# EAGLE board SparkFun_Buck_Regulator_AP63357DV-7_Buck5V-Panel (EAGLE 9.6.2), part 1 of 4
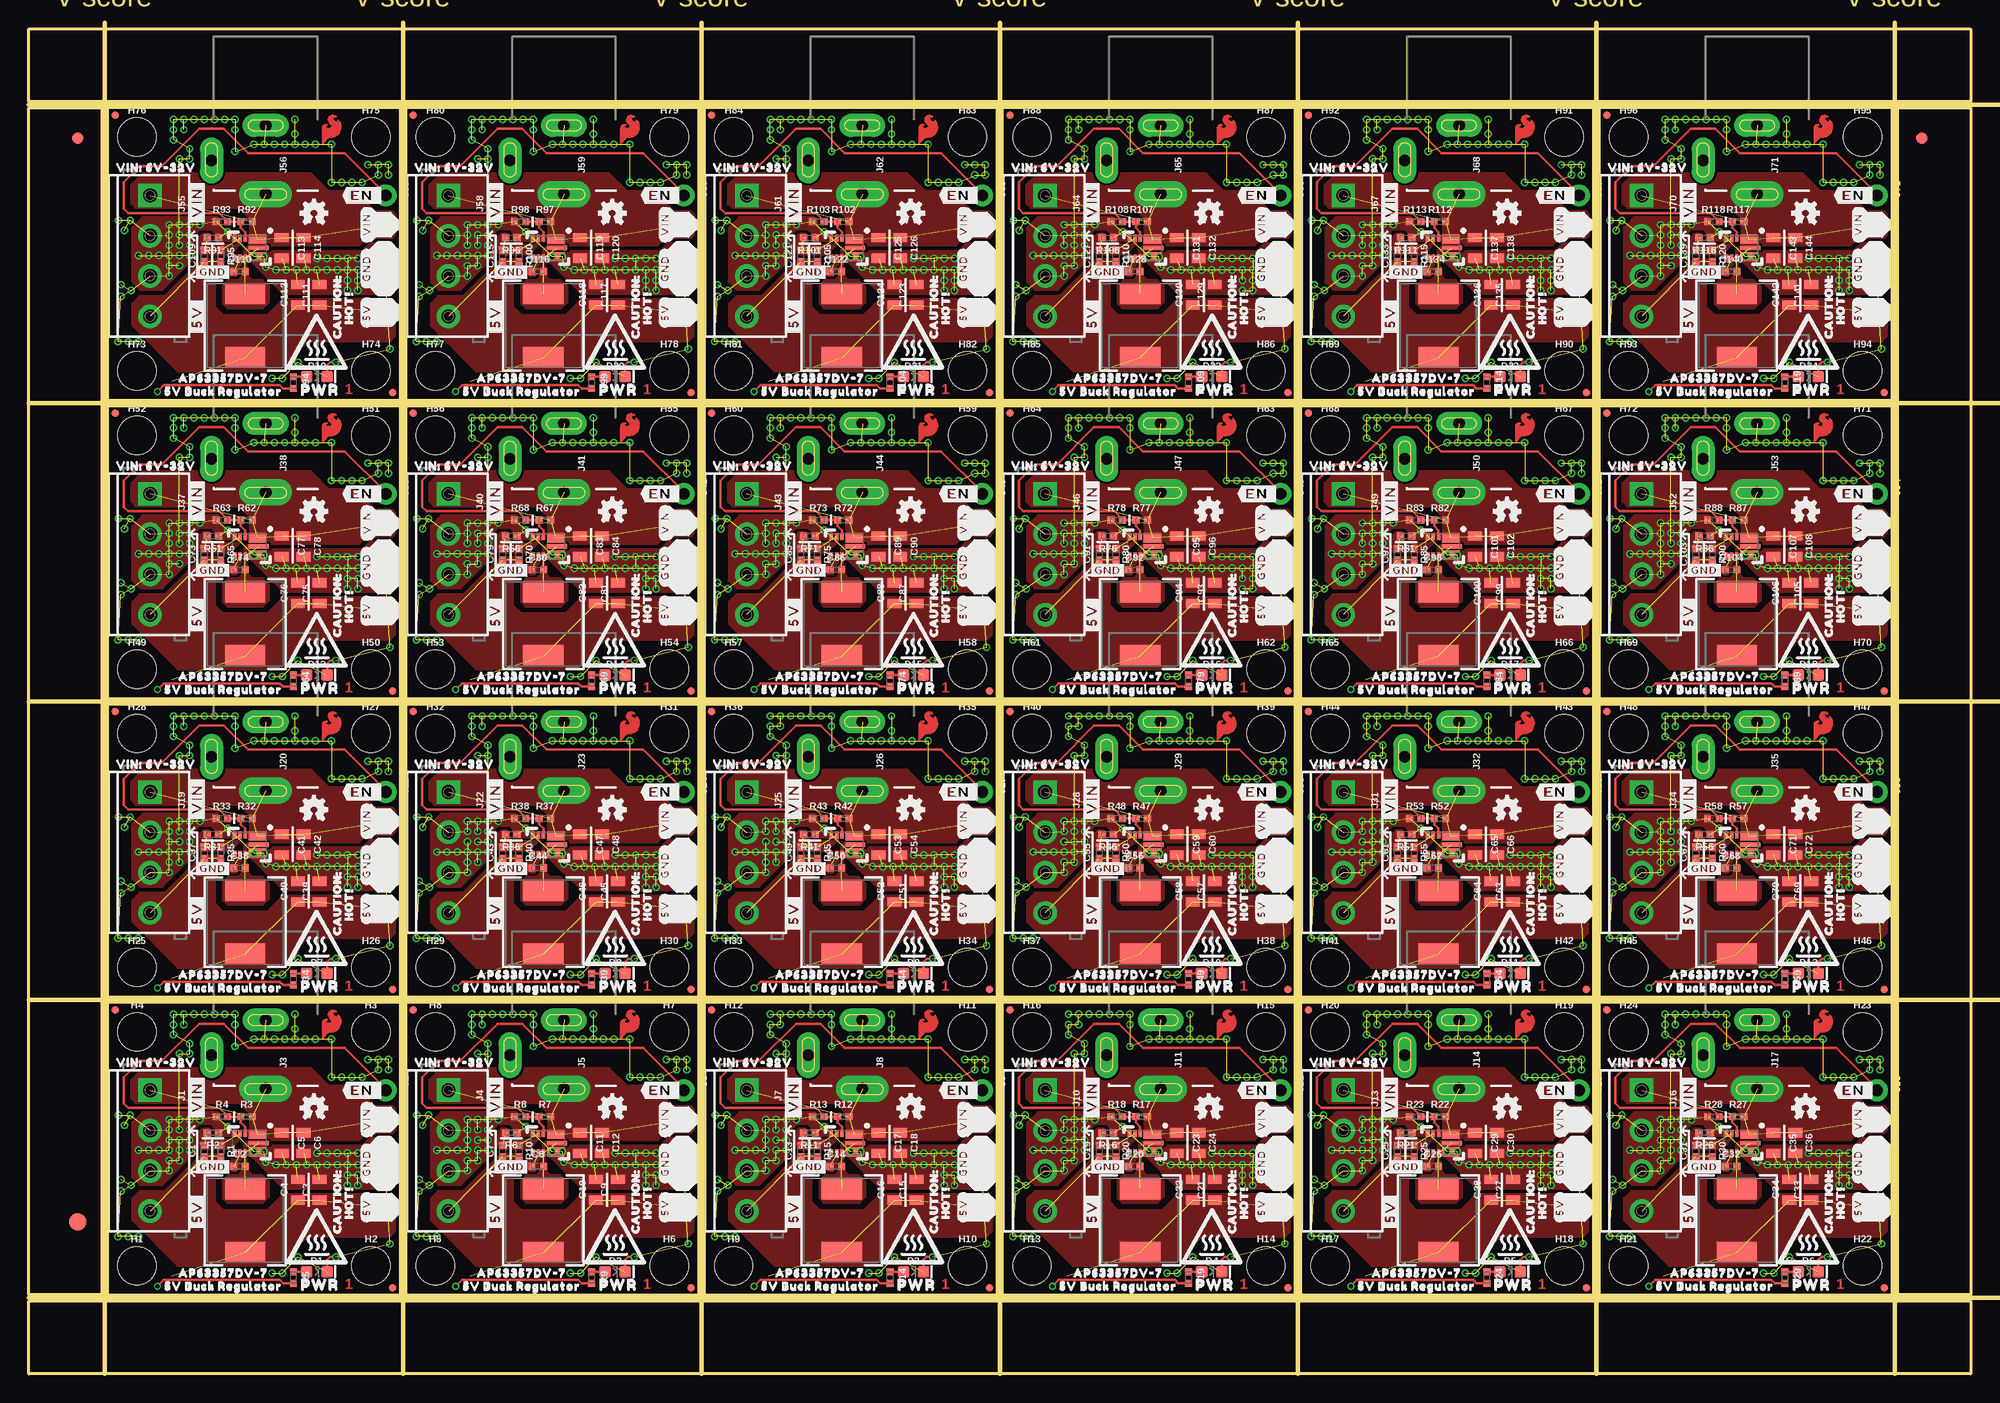
[diagram p0: board, top side]
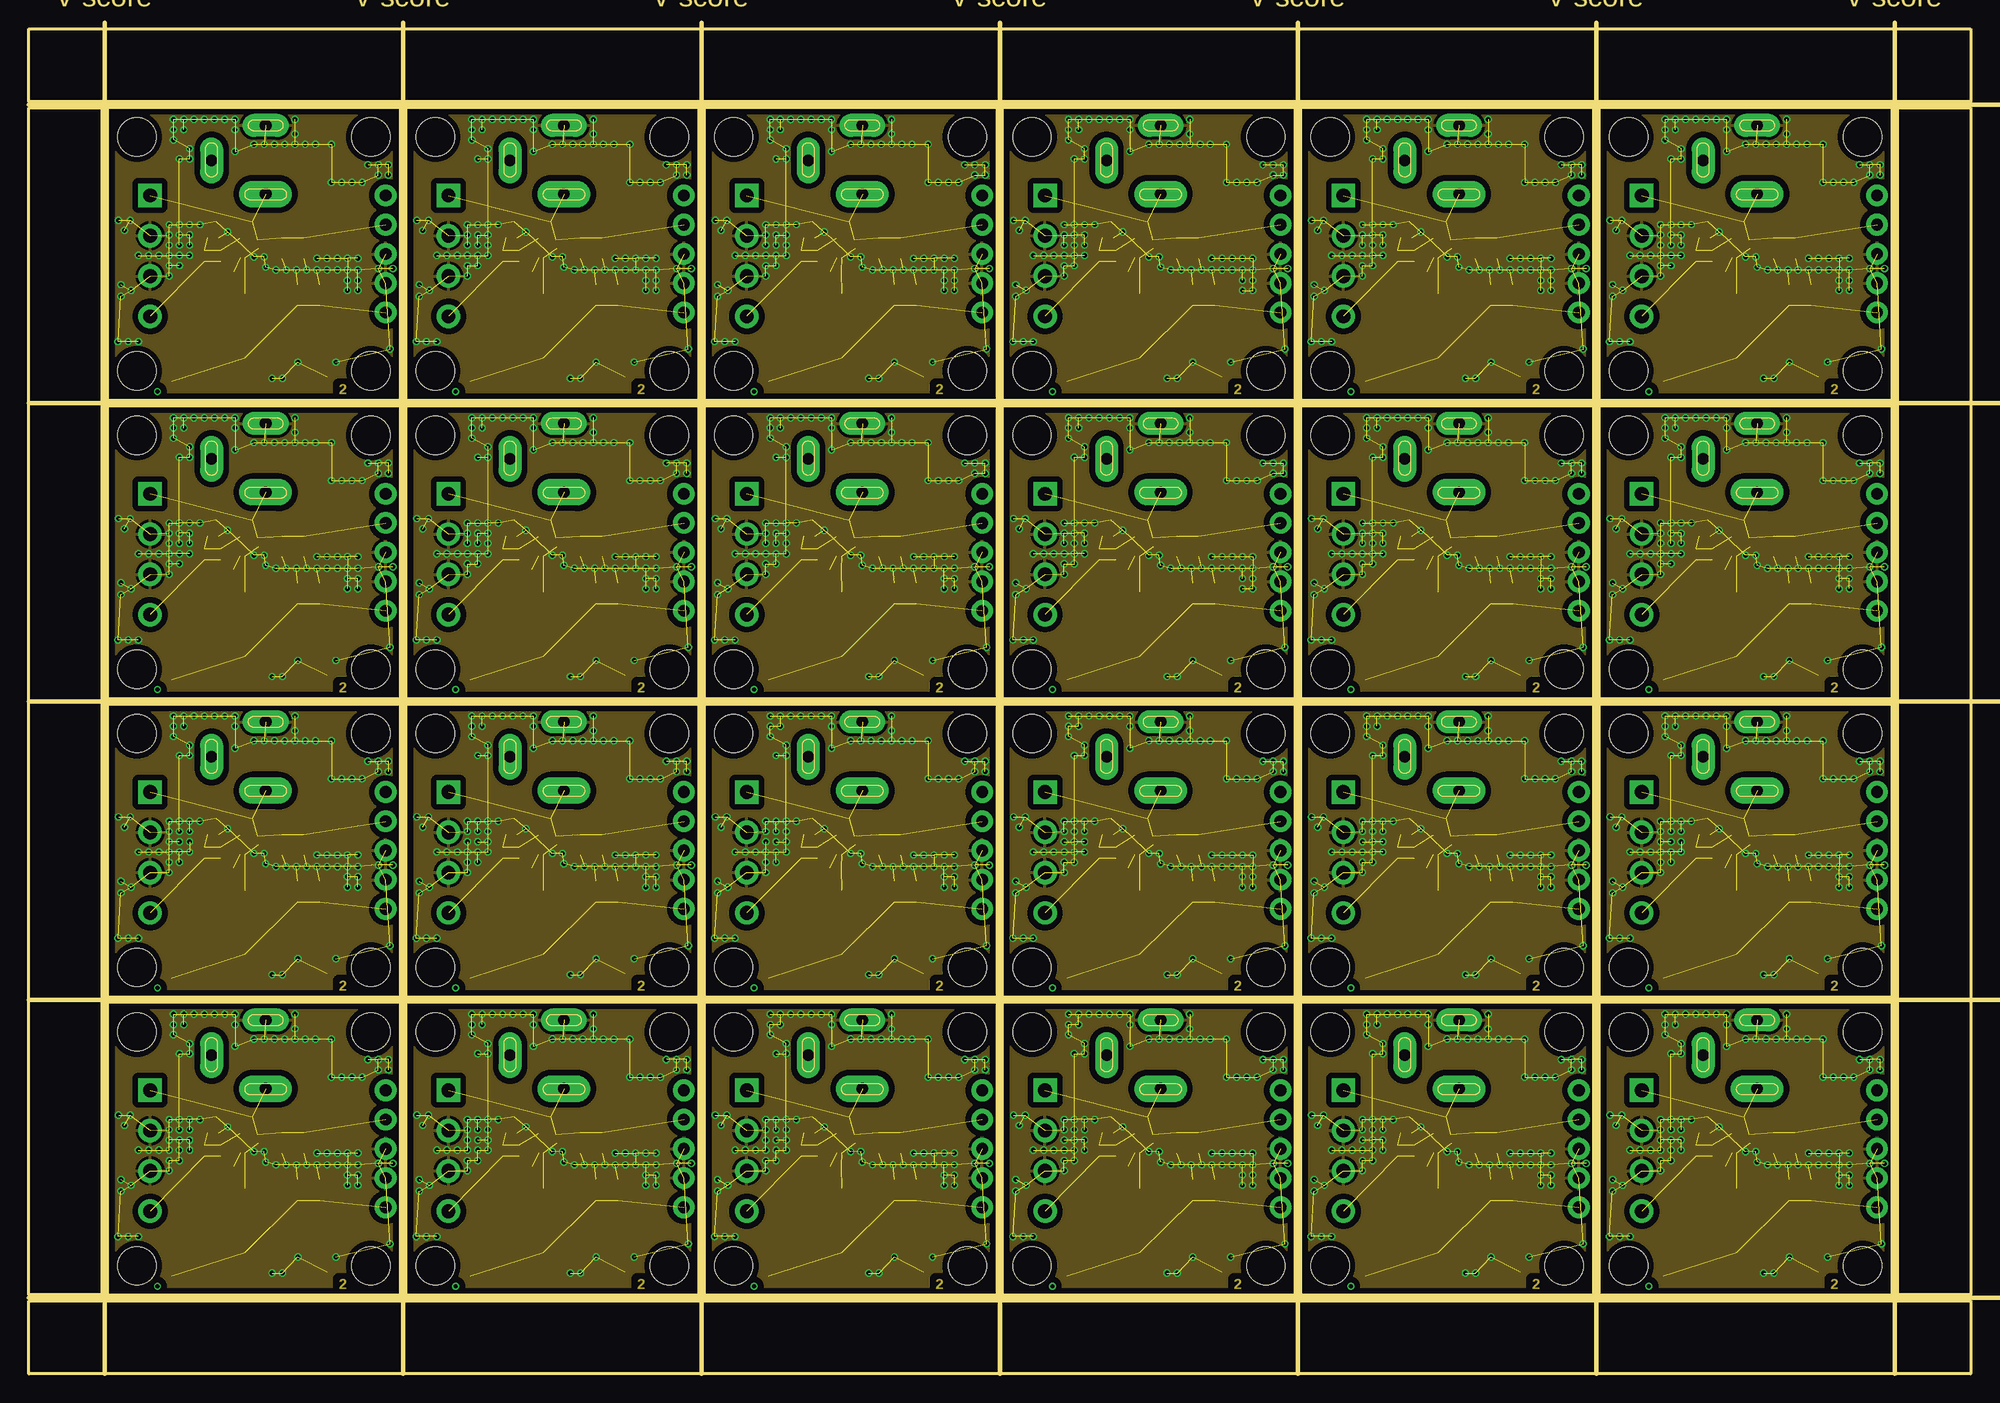
[diagram p1: board, inner layer Route2]
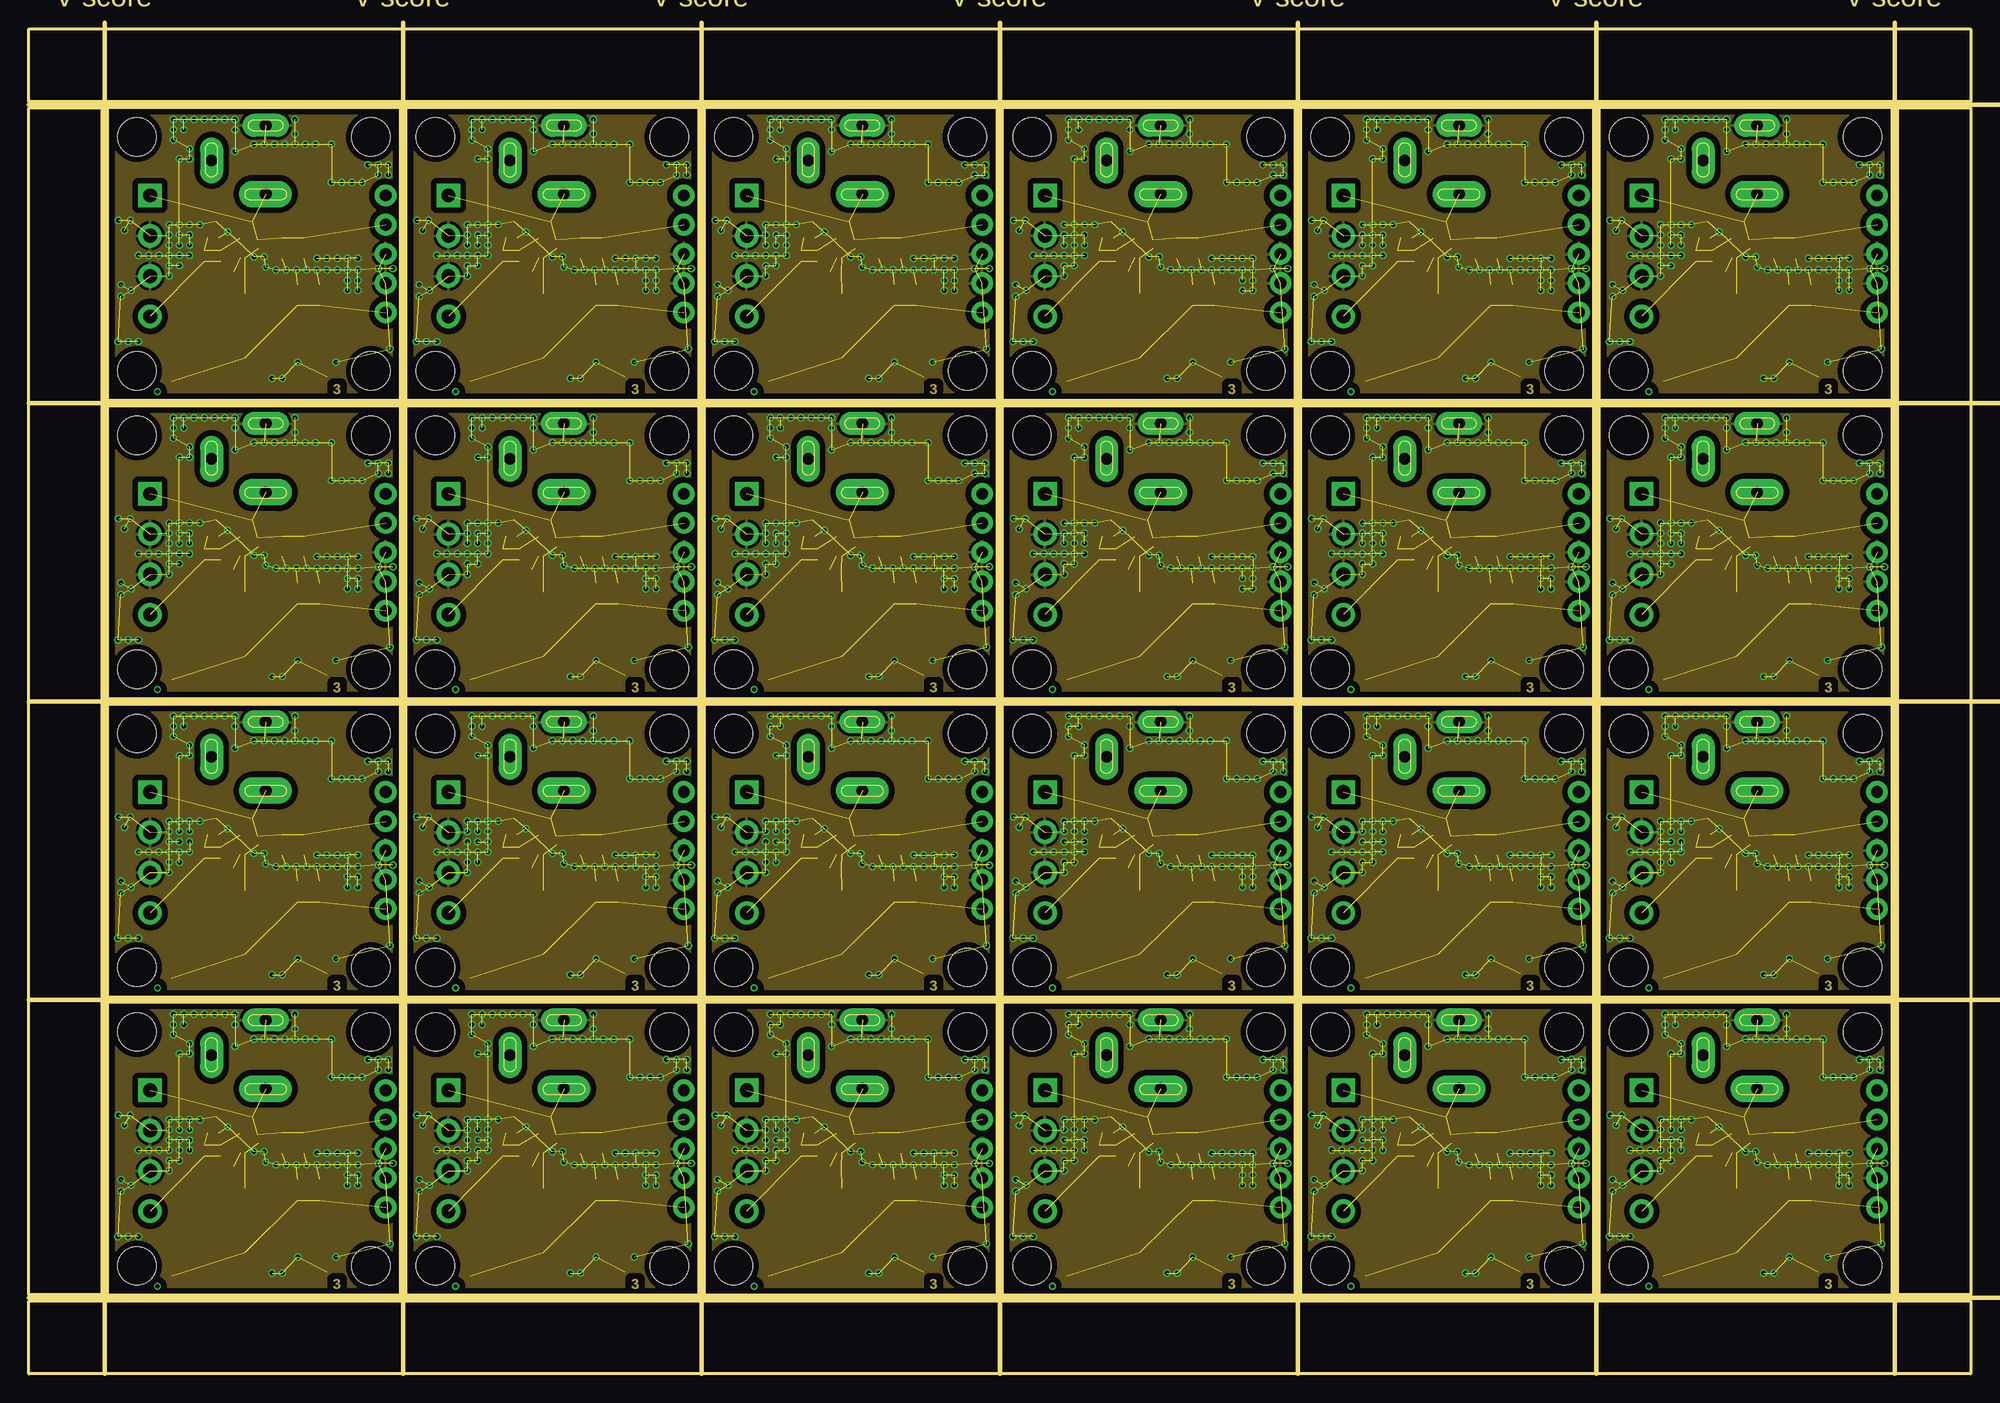
[diagram p2: board, inner layer Route15]
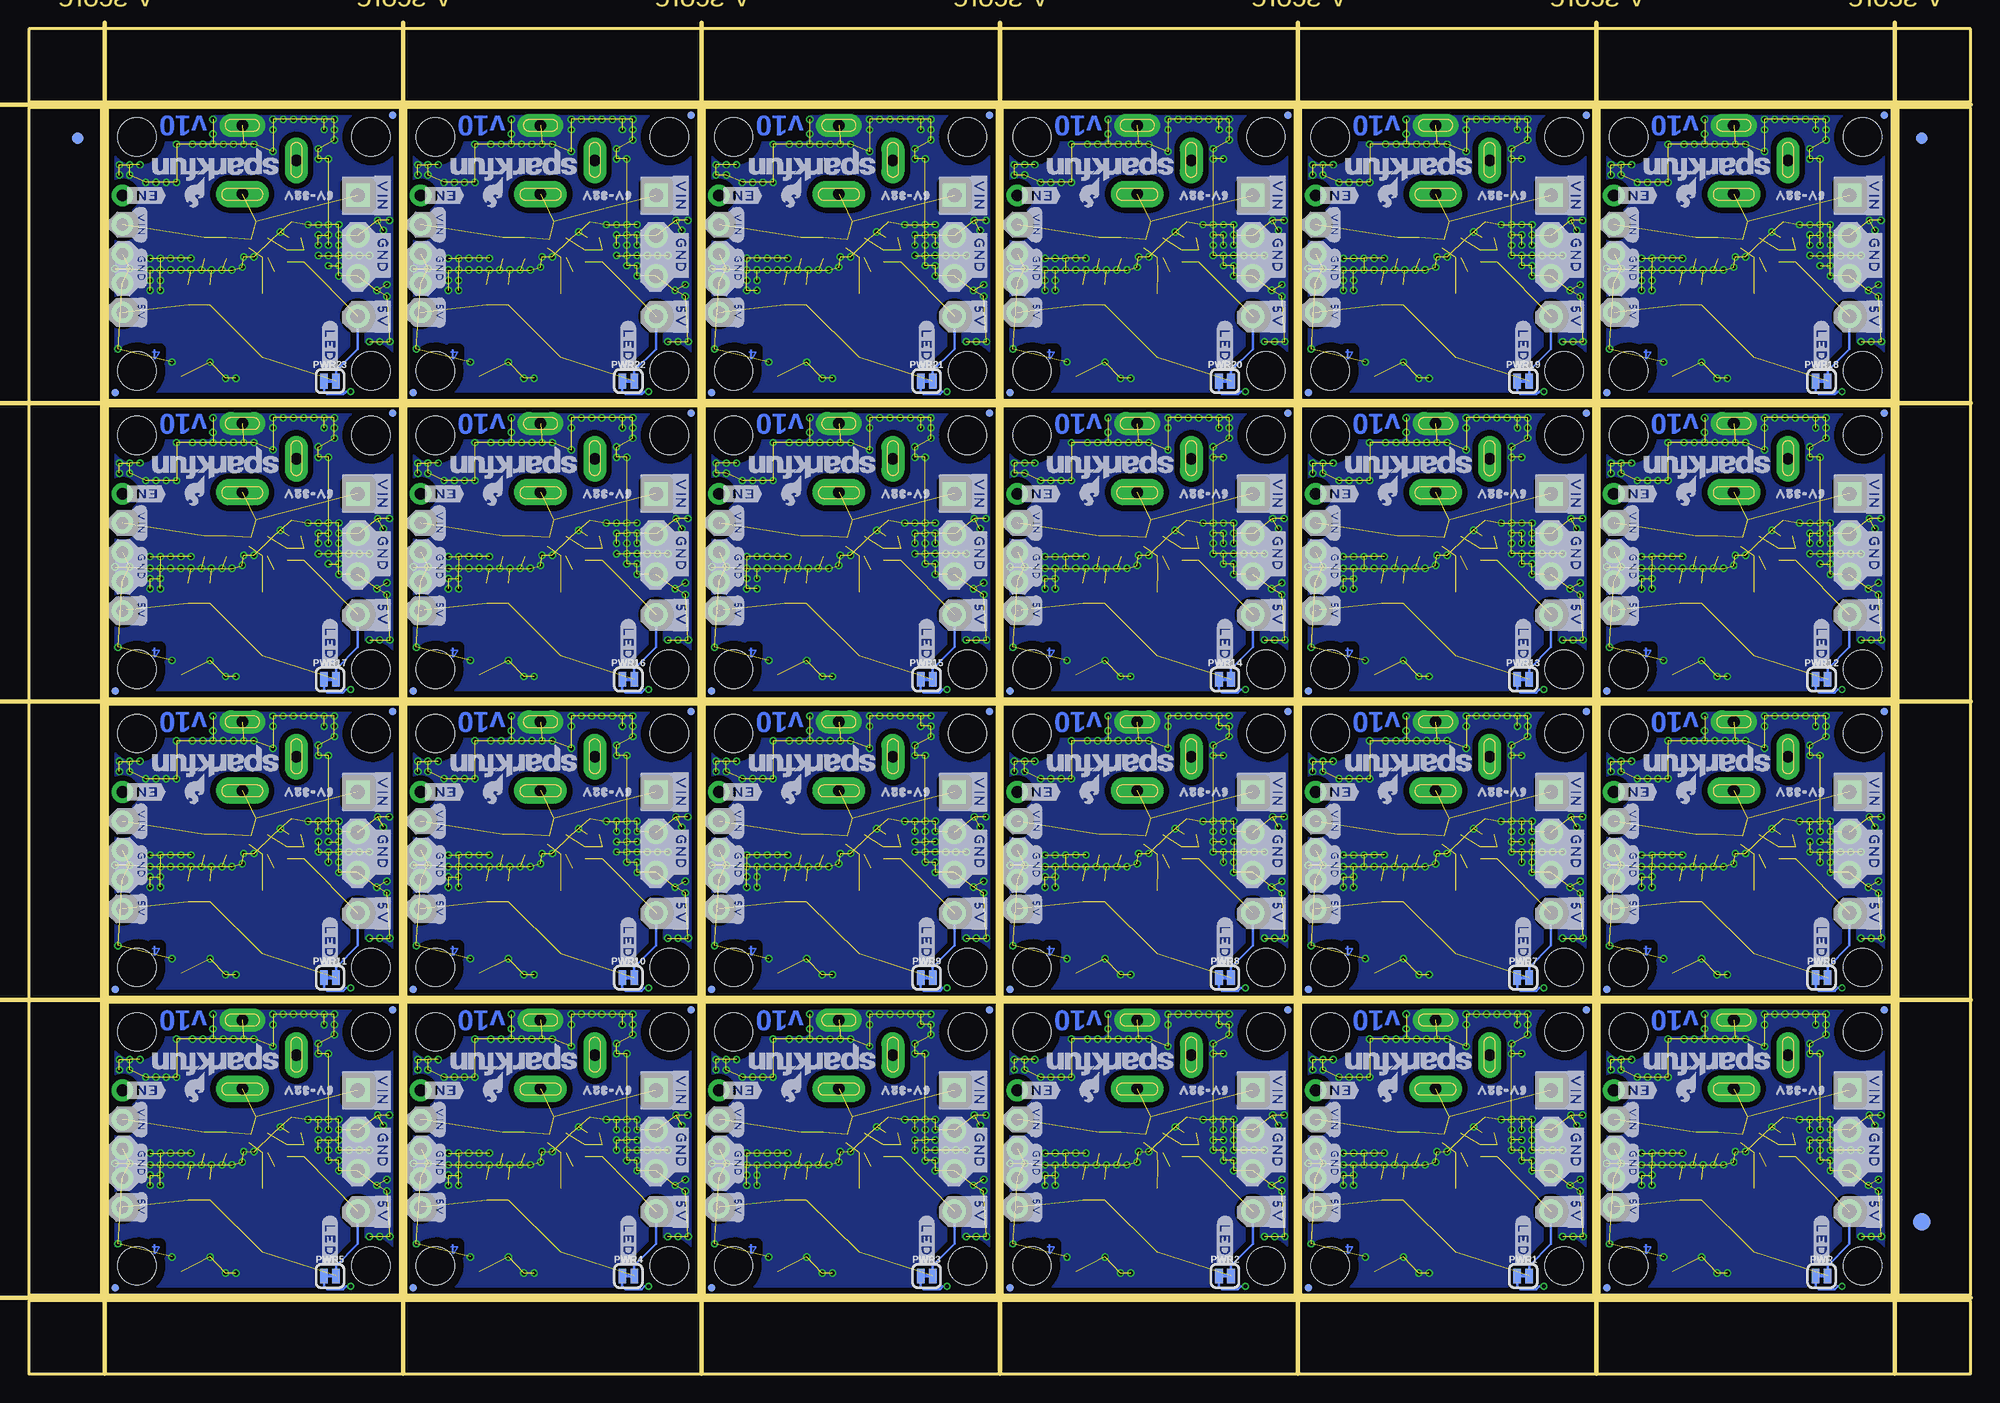
[diagram p3: board, bottom side, seen from below]

Size 168.66 x 116.84 mm. Coordinates in mm from the lower left corner, seen from the top.
Outline: 6.86,6.86 32.26,6.86 32.26,32.26 6.86,32.26 6.86,6.86
Outline: 32.77,6.86 58.17,6.86 58.17,32.26 32.77,32.26 32.77,6.86
Outline: 58.67,6.86 84.07,6.86 84.07,32.26 58.67,32.26 58.67,6.86
Outline: 84.58,6.86 109.98,6.86 109.98,32.26 84.58,32.26 84.58,6.86
Outline: 110.49,6.86 135.89,6.86 135.89,32.26 110.49,32.26 110.49,6.86
Outline: 136.4,6.86 161.8,6.86 161.8,32.26 136.4,32.26 136.4,6.86
Outline: 6.86,32.77 32.26,32.77 32.26,58.17 6.86,58.17 6.86,32.77
Outline: 32.77,32.77 58.17,32.77 58.17,58.17 32.77,58.17 32.77,32.77
Outline: 58.67,32.77 84.07,32.77 84.07,58.17 58.67,58.17 58.67,32.77
Outline: 84.58,32.77 109.98,32.77 109.98,58.17 84.58,58.17 84.58,32.77
Outline: 110.49,32.77 135.89,32.77 135.89,58.17 110.49,58.17 110.49,32.77
Outline: 136.4,32.77 161.8,32.77 161.8,58.17 136.4,58.17 136.4,32.77
Outline: 6.86,58.67 32.26,58.67 32.26,84.07 6.86,84.07 6.86,58.67
Outline: 32.77,58.67 58.17,58.67 58.17,84.07 32.77,84.07 32.77,58.67
Outline: 58.67,58.67 84.07,58.67 84.07,84.07 58.67,84.07 58.67,58.67
Outline: 84.58,58.67 109.98,58.67 109.98,84.07 84.58,84.07 84.58,58.67
Outline: 110.49,58.67 135.89,58.67 135.89,84.07 110.49,84.07 110.49,58.67
Outline: 136.4,58.67 161.8,58.67 161.8,84.07 136.4,84.07 136.4,58.67
Outline: 6.86,84.58 32.26,84.58 32.26,109.98 6.86,109.98 6.86,84.58
Outline: 32.77,84.58 58.17,84.58 58.17,109.98 32.77,109.98 32.77,84.58
Outline: 58.67,84.58 84.07,84.58 84.07,109.98 58.67,109.98 58.67,84.58
Outline: 84.58,84.58 109.98,84.58 109.98,109.98 84.58,109.98 84.58,84.58
Outline: 110.49,84.58 135.89,84.58 135.89,109.98 110.49,109.98 110.49,84.58
Outline: 136.4,84.58 161.8,84.58 161.8,109.98 136.4,109.98 136.4,84.58
Outline: 0,6.35 168.66,6.35 168.66,0 0,0 0,6.35
Outline: 162.31,109.98 168.66,109.98 168.66,6.86 162.31,6.86 162.31,109.98
Outline: 0,116.84 168.66,116.84 168.66,110.49 0,110.49 0,116.84
Outline: 0,109.98 6.35,109.98 6.35,6.86 0,6.86 0,109.98
Copper layers (1*2*15*16): Top 0.035559375mm / dielectric 0.47751875mm / Route2 0.035559375mm / dielectric 0.47751875mm / Route15 0.035559375mm / dielectric 0.47751875mm / Bottom 0.035559375mm
Design rules "SparkFun_Buck_Regulator_AP63357DV-7_Buck5V": minimum track width 5mil, minimum drill 0.2mm, track to track 5mil, track to pad 5mil, pad to pad 5mil, via to via 5mil, smd to smd 5mil, copper to edge 7mil, drill to drill 7mil, minimum pad ring 5mil, minimum via ring 5mil, stop-mask expansion 2.5mil, vias tented up to drill 25mil, thermal gap 10mil
Milling: 12 lines

## Footprints (pad centres in the part's own frame; a part is rotated, then mirrored left to right if it is on the bottom)
0402-TIGHT = smd 0.6 x 0.6: 1 -0.5,0; 2 0.5,0
0805 = smd 0.8 x 1.2: 1 -0.9,0; 2 0.9,0
LED-0603 = smd 1 x 1: A -0.877,0; C 0.877,0
FIDUCIAL-1X2 = smd 1 x 1: 1 0,0
FIDUCIAL-1.5X3 = smd 1.5 x 1.5: 1 0,0
FIDUCIAL-MICRO = smd 0.635 x 0.635: 1 0,0
STAND-OFF = hole 3.302: 0,0
SCREWTERMINAL-3.5MM-4 = drill 1.2 pad 2.032 square: 1 0,0 | drill 1.2 pad 2.032: 2 3.5,0; 3 7,0; 4 10.5,0
1X05_NO_SILK = drill 1.016 pad 1.88: 1 0,0; 2 2.54,0; 3 5.08,0; 4 7.62,0; 5 10.16,0
POWER_JACK_PTH_SLOT_NO_OVRHNG_SILK = drill 1 pad 2 long: GND 0,0; GNDBREAK -3.048,4.699 | drill 1 pad 2.3 long: PWR -5.969,0
07A7_6U8H = smd 1.85 x 3.5: P$1 -2.775,0; P$2 2.775,0
SMT-JUMPER_2_NC_TRACE_SILK = smd 0.66 x 1.27: 1 -0.521,0; 2 0.521,0
V-DFN3020-13 = smd 1.5 x 0.8: P$1 -0.675,-0.75; P$8 -0.675,0.75 | smd 0.3 x 0.6: P$2 0.375,-0.85; P$3 0.825,-0.85; P$4 1.275,-0.85; P$5 1.275,0.85; P$6 0.825,0.85; P$7 0.375,0.85 | smd 1.73 x 0.4: P$9 -0.79,0

## Placement (x,y rotation side)
C1  47pF  [0402-TIGHT]  15.24,19.38 90 top
C2  0.1uF  [0402-TIGHT]  18.29,18.03 0 top
C3  22uF  [0805]  25.27,16 90 top
C4  22uF  [0805]  23.37,16 90 top
C5  4.7uF  [0805]  21.97,20.07 270 top
C6  4.7uF  [0805]  23.88,20.07 270 top
C7  47pF  [0402-TIGHT]  41.15,19.38 90 top
C8  0.1uF  [0402-TIGHT]  44.2,18.03 0 top
C9  22uF  [0805]  51.18,16 90 top
C10  22uF  [0805]  49.28,16 90 top
C11  4.7uF  [0805]  47.88,20.07 270 top
C12  4.7uF  [0805]  49.78,20.07 270 top
C13  47pF  [0402-TIGHT]  67.06,19.38 90 top
C14  0.1uF  [0402-TIGHT]  70.1,18.03 0 top
C15  22uF  [0805]  77.09,16 90 top
C16  22uF  [0805]  75.18,16 90 top
C17  4.7uF  [0805]  73.79,20.07 270 top
C18  4.7uF  [0805]  75.69,20.07 270 top
C19  47pF  [0402-TIGHT]  92.96,19.38 90 top
C20  0.1uF  [0402-TIGHT]  96.01,18.03 0 top
C21  22uF  [0805]  103,16 90 top
C22  22uF  [0805]  101.09,16 90 top
C23  4.7uF  [0805]  99.7,20.07 270 top
C24  4.7uF  [0805]  101.6,20.07 270 top
C25  47pF  [0402-TIGHT]  118.87,19.38 90 top
C26  0.1uF  [0402-TIGHT]  121.92,18.03 0 top
C27  22uF  [0805]  128.91,16 90 top
C28  22uF  [0805]  127,16 90 top
C29  4.7uF  [0805]  125.6,20.07 270 top
C30  4.7uF  [0805]  127.51,20.07 270 top
C31  47pF  [0402-TIGHT]  144.78,19.38 90 top
C32  0.1uF  [0402-TIGHT]  147.83,18.03 0 top
C33  22uF  [0805]  154.81,16 90 top
C34  22uF  [0805]  152.91,16 90 top
C35  4.7uF  [0805]  151.51,20.07 270 top
C36  4.7uF  [0805]  153.42,20.07 270 top
C37  47pF  [0402-TIGHT]  15.24,45.29 90 top
C38  0.1uF  [0402-TIGHT]  18.29,43.94 0 top
C39  22uF  [0805]  25.27,41.91 90 top
C40  22uF  [0805]  23.37,41.91 90 top
C41  4.7uF  [0805]  21.97,45.97 270 top
C42  4.7uF  [0805]  23.88,45.97 270 top
C43  47pF  [0402-TIGHT]  41.15,45.29 90 top
C44  0.1uF  [0402-TIGHT]  44.2,43.94 0 top
C45  22uF  [0805]  51.18,41.91 90 top
C46  22uF  [0805]  49.28,41.91 90 top
C47  4.7uF  [0805]  47.88,45.97 270 top
C48  4.7uF  [0805]  49.78,45.97 270 top
C49  47pF  [0402-TIGHT]  67.06,45.29 90 top
C50  0.1uF  [0402-TIGHT]  70.1,43.94 0 top
C51  22uF  [0805]  77.09,41.91 90 top
C52  22uF  [0805]  75.18,41.91 90 top
C53  4.7uF  [0805]  73.79,45.97 270 top
C54  4.7uF  [0805]  75.69,45.97 270 top
C55  47pF  [0402-TIGHT]  92.96,45.29 90 top
C56  0.1uF  [0402-TIGHT]  96.01,43.94 0 top
C57  22uF  [0805]  103,41.91 90 top
C58  22uF  [0805]  101.09,41.91 90 top
C59  4.7uF  [0805]  99.7,45.97 270 top
C60  4.7uF  [0805]  101.6,45.97 270 top
C61  47pF  [0402-TIGHT]  118.87,45.29 90 top
C62  0.1uF  [0402-TIGHT]  121.92,43.94 0 top
C63  22uF  [0805]  128.91,41.91 90 top
C64  22uF  [0805]  127,41.91 90 top
C65  4.7uF  [0805]  125.6,45.97 270 top
C66  4.7uF  [0805]  127.51,45.97 270 top
C67  47pF  [0402-TIGHT]  144.78,45.29 90 top
C68  0.1uF  [0402-TIGHT]  147.83,43.94 0 top
C69  22uF  [0805]  154.81,41.91 90 top
C70  22uF  [0805]  152.91,41.91 90 top
C71  4.7uF  [0805]  151.51,45.97 270 top
C72  4.7uF  [0805]  153.42,45.97 270 top
C73  47pF  [0402-TIGHT]  15.24,71.2 90 top
C74  0.1uF  [0402-TIGHT]  18.29,69.85 0 top
C75  22uF  [0805]  25.27,67.82 90 top
C76  22uF  [0805]  23.37,67.82 90 top
C77  4.7uF  [0805]  21.97,71.88 270 top
C78  4.7uF  [0805]  23.88,71.88 270 top
C79  47pF  [0402-TIGHT]  41.15,71.2 90 top
C80  0.1uF  [0402-TIGHT]  44.2,69.85 0 top
C81  22uF  [0805]  51.18,67.82 90 top
C82  22uF  [0805]  49.28,67.82 90 top
C83  4.7uF  [0805]  47.88,71.88 270 top
C84  4.7uF  [0805]  49.78,71.88 270 top
C85  47pF  [0402-TIGHT]  67.06,71.2 90 top
C86  0.1uF  [0402-TIGHT]  70.1,69.85 0 top
C87  22uF  [0805]  77.09,67.82 90 top
C88  22uF  [0805]  75.18,67.82 90 top
C89  4.7uF  [0805]  73.79,71.88 270 top
C90  4.7uF  [0805]  75.69,71.88 270 top
C91  47pF  [0402-TIGHT]  92.96,71.2 90 top
C92  0.1uF  [0402-TIGHT]  96.01,69.85 0 top
C93  22uF  [0805]  103,67.82 90 top
C94  22uF  [0805]  101.09,67.82 90 top
C95  4.7uF  [0805]  99.7,71.88 270 top
C96  4.7uF  [0805]  101.6,71.88 270 top
C97  47pF  [0402-TIGHT]  118.87,71.2 90 top
C98  0.1uF  [0402-TIGHT]  121.92,69.85 0 top
C99  22uF  [0805]  128.91,67.82 90 top
C100  22uF  [0805]  127,67.82 90 top
C101  4.7uF  [0805]  125.6,71.88 270 top
C102  4.7uF  [0805]  127.51,71.88 270 top
C103  47pF  [0402-TIGHT]  144.78,71.2 90 top
C104  0.1uF  [0402-TIGHT]  147.83,69.85 0 top
C105  22uF  [0805]  154.81,67.82 90 top
C106  22uF  [0805]  152.91,67.82 90 top
C107  4.7uF  [0805]  151.51,71.88 270 top
C108  4.7uF  [0805]  153.42,71.88 270 top
C109  47pF  [0402-TIGHT]  15.24,97.1 90 top
C110  0.1uF  [0402-TIGHT]  18.29,95.76 0 top
C111  22uF  [0805]  25.27,93.73 90 top
C112  22uF  [0805]  23.37,93.73 90 top
C113  4.7uF  [0805]  21.97,97.79 270 top
C114  4.7uF  [0805]  23.88,97.79 270 top
C115  47pF  [0402-TIGHT]  41.15,97.1 90 top
C116  0.1uF  [0402-TIGHT]  44.2,95.76 0 top
C117  22uF  [0805]  51.18,93.73 90 top
C118  22uF  [0805]  49.28,93.73 90 top
C119  4.7uF  [0805]  47.88,97.79 270 top
C120  4.7uF  [0805]  49.78,97.79 270 top
C121  47pF  [0402-TIGHT]  67.06,97.1 90 top
C122  0.1uF  [0402-TIGHT]  70.1,95.76 0 top
C123  22uF  [0805]  77.09,93.73 90 top
C124  22uF  [0805]  75.18,93.73 90 top
C125  4.7uF  [0805]  73.79,97.79 270 top
C126  4.7uF  [0805]  75.69,97.79 270 top
C127  47pF  [0402-TIGHT]  92.96,97.1 90 top
C128  0.1uF  [0402-TIGHT]  96.01,95.76 0 top
C129  22uF  [0805]  103,93.73 90 top
C130  22uF  [0805]  101.09,93.73 90 top
C131  4.7uF  [0805]  99.7,97.79 270 top
C132  4.7uF  [0805]  101.6,97.79 270 top
C133  47pF  [0402-TIGHT]  118.87,97.1 90 top
C134  0.1uF  [0402-TIGHT]  121.92,95.76 0 top
C135  22uF  [0805]  128.91,93.73 90 top
C136  22uF  [0805]  127,93.73 90 top
C137  4.7uF  [0805]  125.6,97.79 270 top
C138  4.7uF  [0805]  127.51,97.79 270 top
C139  47pF  [0402-TIGHT]  144.78,97.1 90 top
C140  0.1uF  [0402-TIGHT]  147.83,95.76 0 top
C141  22uF  [0805]  154.81,93.73 90 top
C142  22uF  [0805]  152.91,93.73 90 top
C143  4.7uF  [0805]  151.51,97.79 270 top
C144  4.7uF  [0805]  153.42,97.79 270 top
D1  RED  [LED-0603]  25.02,8.89 0 top
D2  RED  [LED-0603]  50.93,8.89 0 top
D3  RED  [LED-0603]  76.84,8.89 0 top
D4  RED  [LED-0603]  102.74,8.89 0 top
D5  RED  [LED-0603]  128.65,8.89 0 top
D6  RED  [LED-0603]  154.56,8.89 0 top
D7  RED  [LED-0603]  25.02,34.8 0 top
D8  RED  [LED-0603]  50.93,34.8 0 top
D9  RED  [LED-0603]  76.84,34.8 0 top
D10  RED  [LED-0603]  102.74,34.8 0 top
D11  RED  [LED-0603]  128.65,34.8 0 top
D12  RED  [LED-0603]  154.56,34.8 0 top
D13  RED  [LED-0603]  25.02,60.71 0 top
D14  RED  [LED-0603]  50.93,60.71 0 top
D15  RED  [LED-0603]  76.84,60.71 0 top
D16  RED  [LED-0603]  102.74,60.71 0 top
D17  RED  [LED-0603]  128.65,60.71 0 top
D18  RED  [LED-0603]  154.56,60.71 0 top
D19  RED  [LED-0603]  25.02,86.61 0 top
D20  RED  [LED-0603]  50.93,86.61 0 top
D21  RED  [LED-0603]  76.84,86.61 0 top
D22  RED  [LED-0603]  102.74,86.61 0 top
D23  RED  [LED-0603]  128.65,86.61 0 top
D24  RED  [LED-0603]  154.56,86.61 0 top
E$1  [FIDUCIAL-1X2]  4.23,107.31 0 top
E$2  [FIDUCIAL-1X2]  4.23,107.31 0 bottom
E$3  [FIDUCIAL-1X2]  164.42,107.31 0 top
E$4  [FIDUCIAL-1X2]  164.42,107.31 0 bottom
E$5  [FIDUCIAL-1.5X3]  4.23,13.21 0 top
E$6  [FIDUCIAL-1.5X3]  4.23,13.21 0 bottom
FD1  FIDUCIALUFIDUCIAL  [FIDUCIAL-MICRO]  31.62,7.49 0 top
FD2  FIDUCIALUFIDUCIAL  [FIDUCIAL-MICRO]  7.49,31.62 0 top
FD3  FIDUCIALUFIDUCIAL  [FIDUCIAL-MICRO]  31.62,7.49 0 bottom
FD4  FIDUCIALUFIDUCIAL  [FIDUCIAL-MICRO]  7.49,31.62 0 bottom
FD5  FIDUCIALUFIDUCIAL  [FIDUCIAL-MICRO]  57.53,7.49 0 top
FD6  FIDUCIALUFIDUCIAL  [FIDUCIAL-MICRO]  33.4,31.62 0 top
FD7  FIDUCIALUFIDUCIAL  [FIDUCIAL-MICRO]  57.53,7.49 0 bottom
FD8  FIDUCIALUFIDUCIAL  [FIDUCIAL-MICRO]  33.4,31.62 0 bottom
FD9  FIDUCIALUFIDUCIAL  [FIDUCIAL-MICRO]  83.44,7.49 0 top
FD10  FIDUCIALUFIDUCIAL  [FIDUCIAL-MICRO]  59.31,31.62 0 top
FD11  FIDUCIALUFIDUCIAL  [FIDUCIAL-MICRO]  83.44,7.49 0 bottom
FD12  FIDUCIALUFIDUCIAL  [FIDUCIAL-MICRO]  59.31,31.62 0 bottom
FD13  FIDUCIALUFIDUCIAL  [FIDUCIAL-MICRO]  109.35,7.49 0 top
FD14  FIDUCIALUFIDUCIAL  [FIDUCIAL-MICRO]  85.22,31.62 0 top
FD15  FIDUCIALUFIDUCIAL  [FIDUCIAL-MICRO]  109.35,7.49 0 bottom
FD16  FIDUCIALUFIDUCIAL  [FIDUCIAL-MICRO]  85.22,31.62 0 bottom
FD17  FIDUCIALUFIDUCIAL  [FIDUCIAL-MICRO]  135.25,7.49 0 top
FD18  FIDUCIALUFIDUCIAL  [FIDUCIAL-MICRO]  111.12,31.62 0 top
FD19  FIDUCIALUFIDUCIAL  [FIDUCIAL-MICRO]  135.25,7.49 0 bottom
FD20  FIDUCIALUFIDUCIAL  [FIDUCIAL-MICRO]  111.12,31.62 0 bottom
FD21  FIDUCIALUFIDUCIAL  [FIDUCIAL-MICRO]  161.16,7.49 0 top
FD22  FIDUCIALUFIDUCIAL  [FIDUCIAL-MICRO]  137.03,31.62 0 top
FD23  FIDUCIALUFIDUCIAL  [FIDUCIAL-MICRO]  161.16,7.49 0 bottom
FD24  FIDUCIALUFIDUCIAL  [FIDUCIAL-MICRO]  137.03,31.62 0 bottom
FD25  FIDUCIALUFIDUCIAL  [FIDUCIAL-MICRO]  31.62,33.4 0 top
FD26  FIDUCIALUFIDUCIAL  [FIDUCIAL-MICRO]  7.49,57.53 0 top
FD27  FIDUCIALUFIDUCIAL  [FIDUCIAL-MICRO]  31.62,33.4 0 bottom
FD28  FIDUCIALUFIDUCIAL  [FIDUCIAL-MICRO]  7.49,57.53 0 bottom
FD29  FIDUCIALUFIDUCIAL  [FIDUCIAL-MICRO]  57.53,33.4 0 top
FD30  FIDUCIALUFIDUCIAL  [FIDUCIAL-MICRO]  33.4,57.53 0 top
FD31  FIDUCIALUFIDUCIAL  [FIDUCIAL-MICRO]  57.53,33.4 0 bottom
FD32  FIDUCIALUFIDUCIAL  [FIDUCIAL-MICRO]  33.4,57.53 0 bottom
FD33  FIDUCIALUFIDUCIAL  [FIDUCIAL-MICRO]  83.44,33.4 0 top
FD34  FIDUCIALUFIDUCIAL  [FIDUCIAL-MICRO]  59.31,57.53 0 top
FD35  FIDUCIALUFIDUCIAL  [FIDUCIAL-MICRO]  83.44,33.4 0 bottom
FD36  FIDUCIALUFIDUCIAL  [FIDUCIAL-MICRO]  59.31,57.53 0 bottom
FD37  FIDUCIALUFIDUCIAL  [FIDUCIAL-MICRO]  109.35,33.4 0 top
FD38  FIDUCIALUFIDUCIAL  [FIDUCIAL-MICRO]  85.22,57.53 0 top
FD39  FIDUCIALUFIDUCIAL  [FIDUCIAL-MICRO]  109.35,33.4 0 bottom
FD40  FIDUCIALUFIDUCIAL  [FIDUCIAL-MICRO]  85.22,57.53 0 bottom
FD41  FIDUCIALUFIDUCIAL  [FIDUCIAL-MICRO]  135.25,33.4 0 top
FD42  FIDUCIALUFIDUCIAL  [FIDUCIAL-MICRO]  111.12,57.53 0 top
FD43  FIDUCIALUFIDUCIAL  [FIDUCIAL-MICRO]  135.25,33.4 0 bottom
FD44  FIDUCIALUFIDUCIAL  [FIDUCIAL-MICRO]  111.12,57.53 0 bottom
FD45  FIDUCIALUFIDUCIAL  [FIDUCIAL-MICRO]  161.16,33.4 0 top
FD46  FIDUCIALUFIDUCIAL  [FIDUCIAL-MICRO]  137.03,57.53 0 top
FD47  FIDUCIALUFIDUCIAL  [FIDUCIAL-MICRO]  161.16,33.4 0 bottom
FD48  FIDUCIALUFIDUCIAL  [FIDUCIAL-MICRO]  137.03,57.53 0 bottom
FD49  FIDUCIALUFIDUCIAL  [FIDUCIAL-MICRO]  31.62,59.31 0 top
FD50  FIDUCIALUFIDUCIAL  [FIDUCIAL-MICRO]  7.49,83.44 0 top
FD51  FIDUCIALUFIDUCIAL  [FIDUCIAL-MICRO]  31.62,59.31 0 bottom
FD52  FIDUCIALUFIDUCIAL  [FIDUCIAL-MICRO]  7.49,83.44 0 bottom
FD53  FIDUCIALUFIDUCIAL  [FIDUCIAL-MICRO]  57.53,59.31 0 top
FD54  FIDUCIALUFIDUCIAL  [FIDUCIAL-MICRO]  33.4,83.44 0 top
FD55  FIDUCIALUFIDUCIAL  [FIDUCIAL-MICRO]  57.53,59.31 0 bottom
FD56  FIDUCIALUFIDUCIAL  [FIDUCIAL-MICRO]  33.4,83.44 0 bottom
FD57  FIDUCIALUFIDUCIAL  [FIDUCIAL-MICRO]  83.44,59.31 0 top
FD58  FIDUCIALUFIDUCIAL  [FIDUCIAL-MICRO]  59.31,83.44 0 top
FD59  FIDUCIALUFIDUCIAL  [FIDUCIAL-MICRO]  83.44,59.31 0 bottom
FD60  FIDUCIALUFIDUCIAL  [FIDUCIAL-MICRO]  59.31,83.44 0 bottom
FD61  FIDUCIALUFIDUCIAL  [FIDUCIAL-MICRO]  109.35,59.31 0 top
FD62  FIDUCIALUFIDUCIAL  [FIDUCIAL-MICRO]  85.22,83.44 0 top
FD63  FIDUCIALUFIDUCIAL  [FIDUCIAL-MICRO]  109.35,59.31 0 bottom
FD64  FIDUCIALUFIDUCIAL  [FIDUCIAL-MICRO]  85.22,83.44 0 bottom
FD65  FIDUCIALUFIDUCIAL  [FIDUCIAL-MICRO]  135.25,59.31 0 top
FD66  FIDUCIALUFIDUCIAL  [FIDUCIAL-MICRO]  111.12,83.44 0 top
FD67  FIDUCIALUFIDUCIAL  [FIDUCIAL-MICRO]  135.25,59.31 0 bottom
FD68  FIDUCIALUFIDUCIAL  [FIDUCIAL-MICRO]  111.12,83.44 0 bottom
FD69  FIDUCIALUFIDUCIAL  [FIDUCIAL-MICRO]  161.16,59.31 0 top
FD70  FIDUCIALUFIDUCIAL  [FIDUCIAL-MICRO]  137.03,83.44 0 top
FD71  FIDUCIALUFIDUCIAL  [FIDUCIAL-MICRO]  161.16,59.31 0 bottom
FD72  FIDUCIALUFIDUCIAL  [FIDUCIAL-MICRO]  137.03,83.44 0 bottom
FD73  FIDUCIALUFIDUCIAL  [FIDUCIAL-MICRO]  31.62,85.22 0 top
FD74  FIDUCIALUFIDUCIAL  [FIDUCIAL-MICRO]  7.49,109.35 0 top
FD75  FIDUCIALUFIDUCIAL  [FIDUCIAL-MICRO]  31.62,85.22 0 bottom
FD76  FIDUCIALUFIDUCIAL  [FIDUCIAL-MICRO]  7.49,109.35 0 bottom
FD77  FIDUCIALUFIDUCIAL  [FIDUCIAL-MICRO]  57.53,85.22 0 top
FD78  FIDUCIALUFIDUCIAL  [FIDUCIAL-MICRO]  33.4,109.35 0 top
FD79  FIDUCIALUFIDUCIAL  [FIDUCIAL-MICRO]  57.53,85.22 0 bottom
FD80  FIDUCIALUFIDUCIAL  [FIDUCIAL-MICRO]  33.4,109.35 0 bottom
FD81  FIDUCIALUFIDUCIAL  [FIDUCIAL-MICRO]  83.44,85.22 0 top
FD82  FIDUCIALUFIDUCIAL  [FIDUCIAL-MICRO]  59.31,109.35 0 top
FD83  FIDUCIALUFIDUCIAL  [FIDUCIAL-MICRO]  83.44,85.22 0 bottom
FD84  FIDUCIALUFIDUCIAL  [FIDUCIAL-MICRO]  59.31,109.35 0 bottom
FD85  FIDUCIALUFIDUCIAL  [FIDUCIAL-MICRO]  109.35,85.22 0 top
FD86  FIDUCIALUFIDUCIAL  [FIDUCIAL-MICRO]  85.22,109.35 0 top
FD87  FIDUCIALUFIDUCIAL  [FIDUCIAL-MICRO]  109.35,85.22 0 bottom
FD88  FIDUCIALUFIDUCIAL  [FIDUCIAL-MICRO]  85.22,109.35 0 bottom
FD89  FIDUCIALUFIDUCIAL  [FIDUCIAL-MICRO]  135.25,85.22 0 top
FD90  FIDUCIALUFIDUCIAL  [FIDUCIAL-MICRO]  111.12,109.35 0 top
FD91  FIDUCIALUFIDUCIAL  [FIDUCIAL-MICRO]  135.25,85.22 0 bottom
FD92  FIDUCIALUFIDUCIAL  [FIDUCIAL-MICRO]  111.12,109.35 0 bottom
FD93  FIDUCIALUFIDUCIAL  [FIDUCIAL-MICRO]  161.16,85.22 0 top
FD94  FIDUCIALUFIDUCIAL  [FIDUCIAL-MICRO]  137.03,109.35 0 top
FD95  FIDUCIALUFIDUCIAL  [FIDUCIAL-MICRO]  161.16,85.22 0 bottom
FD96  FIDUCIALUFIDUCIAL  [FIDUCIAL-MICRO]  137.03,109.35 0 bottom
H1  STAND-OFF  [STAND-OFF]  9.4,9.4 0 top
H2  STAND-OFF  [STAND-OFF]  29.72,9.4 0 top
H3  STAND-OFF  [STAND-OFF]  29.72,29.72 0 top
H4  STAND-OFF  [STAND-OFF]  9.4,29.72 0 top
H5  STAND-OFF  [STAND-OFF]  35.31,9.4 0 top
H6  STAND-OFF  [STAND-OFF]  55.63,9.4 0 top
H7  STAND-OFF  [STAND-OFF]  55.63,29.72 0 top
H8  STAND-OFF  [STAND-OFF]  35.31,29.72 0 top
H9  STAND-OFF  [STAND-OFF]  61.21,9.4 0 top
H10  STAND-OFF  [STAND-OFF]  81.53,9.4 0 top
H11  STAND-OFF  [STAND-OFF]  81.53,29.72 0 top
H12  STAND-OFF  [STAND-OFF]  61.21,29.72 0 top
H13  STAND-OFF  [STAND-OFF]  87.12,9.4 0 top
H14  STAND-OFF  [STAND-OFF]  107.44,9.4 0 top
H15  STAND-OFF  [STAND-OFF]  107.44,29.72 0 top
H16  STAND-OFF  [STAND-OFF]  87.12,29.72 0 top
H17  STAND-OFF  [STAND-OFF]  113.03,9.4 0 top
H18  STAND-OFF  [STAND-OFF]  133.35,9.4 0 top
H19  STAND-OFF  [STAND-OFF]  133.35,29.72 0 top
H20  STAND-OFF  [STAND-OFF]  113.03,29.72 0 top
H21  STAND-OFF  [STAND-OFF]  138.94,9.4 0 top
H22  STAND-OFF  [STAND-OFF]  159.26,9.4 0 top
H23  STAND-OFF  [STAND-OFF]  159.26,29.72 0 top
H24  STAND-OFF  [STAND-OFF]  138.94,29.72 0 top
H25  STAND-OFF  [STAND-OFF]  9.4,35.31 0 top
H26  STAND-OFF  [STAND-OFF]  29.72,35.31 0 top
H27  STAND-OFF  [STAND-OFF]  29.72,55.63 0 top
H28  STAND-OFF  [STAND-OFF]  9.4,55.63 0 top
H29  STAND-OFF  [STAND-OFF]  35.31,35.31 0 top
H30  STAND-OFF  [STAND-OFF]  55.63,35.31 0 top
H31  STAND-OFF  [STAND-OFF]  55.63,55.63 0 top
H32  STAND-OFF  [STAND-OFF]  35.31,55.63 0 top
H33  STAND-OFF  [STAND-OFF]  61.21,35.31 0 top
H34  STAND-OFF  [STAND-OFF]  81.53,35.31 0 top
H35  STAND-OFF  [STAND-OFF]  81.53,55.63 0 top
H36  STAND-OFF  [STAND-OFF]  61.21,55.63 0 top
H37  STAND-OFF  [STAND-OFF]  87.12,35.31 0 top
H38  STAND-OFF  [STAND-OFF]  107.44,35.31 0 top
H39  STAND-OFF  [STAND-OFF]  107.44,55.63 0 top
H40  STAND-OFF  [STAND-OFF]  87.12,55.63 0 top
H41  STAND-OFF  [STAND-OFF]  113.03,35.31 0 top
H42  STAND-OFF  [STAND-OFF]  133.35,35.31 0 top
H43  STAND-OFF  [STAND-OFF]  133.35,55.63 0 top
H44  STAND-OFF  [STAND-OFF]  113.03,55.63 0 top
H45  STAND-OFF  [STAND-OFF]  138.94,35.31 0 top
H46  STAND-OFF  [STAND-OFF]  159.26,35.31 0 top
H47  STAND-OFF  [STAND-OFF]  159.26,55.63 0 top
H48  STAND-OFF  [STAND-OFF]  138.94,55.63 0 top
H49  STAND-OFF  [STAND-OFF]  9.4,61.21 0 top
H50  STAND-OFF  [STAND-OFF]  29.72,61.21 0 top
H51  STAND-OFF  [STAND-OFF]  29.72,81.53 0 top
H52  STAND-OFF  [STAND-OFF]  9.4,81.53 0 top
H53  STAND-OFF  [STAND-OFF]  35.31,61.21 0 top
H54  STAND-OFF  [STAND-OFF]  55.63,61.21 0 top
H55  STAND-OFF  [STAND-OFF]  55.63,81.53 0 top
H56  STAND-OFF  [STAND-OFF]  35.31,81.53 0 top
H57  STAND-OFF  [STAND-OFF]  61.21,61.21 0 top
H58  STAND-OFF  [STAND-OFF]  81.53,61.21 0 top
H59  STAND-OFF  [STAND-OFF]  81.53,81.53 0 top
H60  STAND-OFF  [STAND-OFF]  61.21,81.53 0 top
H61  STAND-OFF  [STAND-OFF]  87.12,61.21 0 top
H62  STAND-OFF  [STAND-OFF]  107.44,61.21 0 top
H63  STAND-OFF  [STAND-OFF]  107.44,81.53 0 top
H64  STAND-OFF  [STAND-OFF]  87.12,81.53 0 top
H65  STAND-OFF  [STAND-OFF]  113.03,61.21 0 top
H66  STAND-OFF  [STAND-OFF]  133.35,61.21 0 top
H67  STAND-OFF  [STAND-OFF]  133.35,81.53 0 top
H68  STAND-OFF  [STAND-OFF]  113.03,81.53 0 top
H69  STAND-OFF  [STAND-OFF]  138.94,61.21 0 top
H70  STAND-OFF  [STAND-OFF]  159.26,61.21 0 top
H71  STAND-OFF  [STAND-OFF]  159.26,81.53 0 top
H72  STAND-OFF  [STAND-OFF]  138.94,81.53 0 top
H73  STAND-OFF  [STAND-OFF]  9.4,87.12 0 top
H74  STAND-OFF  [STAND-OFF]  29.72,87.12 0 top
H75  STAND-OFF  [STAND-OFF]  29.72,107.44 0 top
H76  STAND-OFF  [STAND-OFF]  9.4,107.44 0 top
H77  STAND-OFF  [STAND-OFF]  35.31,87.12 0 top
H78  STAND-OFF  [STAND-OFF]  55.63,87.12 0 top
H79  STAND-OFF  [STAND-OFF]  55.63,107.44 0 top
H80  STAND-OFF  [STAND-OFF]  35.31,107.44 0 top
H81  STAND-OFF  [STAND-OFF]  61.21,87.12 0 top
H82  STAND-OFF  [STAND-OFF]  81.53,87.12 0 top
H83  STAND-OFF  [STAND-OFF]  81.53,107.44 0 top
H84  STAND-OFF  [STAND-OFF]  61.21,107.44 0 top
H85  STAND-OFF  [STAND-OFF]  87.12,87.12 0 top
H86  STAND-OFF  [STAND-OFF]  107.44,87.12 0 top
H87  STAND-OFF  [STAND-OFF]  107.44,107.44 0 top
H88  STAND-OFF  [STAND-OFF]  87.12,107.44 0 top
H89  STAND-OFF  [STAND-OFF]  113.03,87.12 0 top
H90  STAND-OFF  [STAND-OFF]  133.35,87.12 0 top
H91  STAND-OFF  [STAND-OFF]  133.35,107.44 0 top
H92  STAND-OFF  [STAND-OFF]  113.03,107.44 0 top
H93  STAND-OFF  [STAND-OFF]  138.94,87.12 0 top
H94  STAND-OFF  [STAND-OFF]  159.26,87.12 0 top
H95  STAND-OFF  [STAND-OFF]  159.26,107.44 0 top
H96  STAND-OFF  [STAND-OFF]  138.94,107.44 0 top
J1  [SCREWTERMINAL-3.5MM-4]  10.54,24.64 270 top
J2  [1X05_NO_SILK]  30.99,24.64 270 top
J3  POWER_JACK  [POWER_JACK_PTH_SLOT_NO_OVRHNG_SILK]  20.57,30.73 90 top
J4  [SCREWTERMINAL-3.5MM-4]  36.45,24.64 270 top
J5  POWER_JACK  [POWER_JACK_PTH_SLOT_NO_OVRHNG_SILK]  46.48,30.73 90 top
J6  [1X05_NO_SILK]  56.9,24.64 270 top
J7  [SCREWTERMINAL-3.5MM-4]  62.36,24.64 270 top
J8  POWER_JACK  [POWER_JACK_PTH_SLOT_NO_OVRHNG_SILK]  72.39,30.73 90 top
J9  [1X05_NO_SILK]  82.8,24.64 270 top
J10  [SCREWTERMINAL-3.5MM-4]  88.27,24.64 270 top
J11  POWER_JACK  [POWER_JACK_PTH_SLOT_NO_OVRHNG_SILK]  98.3,30.73 90 top
J12  [1X05_NO_SILK]  108.71,24.64 270 top
J13  [SCREWTERMINAL-3.5MM-4]  114.17,24.64 270 top
J14  POWER_JACK  [POWER_JACK_PTH_SLOT_NO_OVRHNG_SILK]  124.21,30.73 90 top
J15  [1X05_NO_SILK]  134.62,24.64 270 top
J16  [SCREWTERMINAL-3.5MM-4]  140.08,24.64 270 top
J17  POWER_JACK  [POWER_JACK_PTH_SLOT_NO_OVRHNG_SILK]  150.11,30.73 90 top
J18  [1X05_NO_SILK]  160.53,24.64 270 top
J19  [SCREWTERMINAL-3.5MM-4]  10.54,50.55 270 top
J20  POWER_JACK  [POWER_JACK_PTH_SLOT_NO_OVRHNG_SILK]  20.57,56.64 90 top
J21  [1X05_NO_SILK]  30.99,50.55 270 top
J22  [SCREWTERMINAL-3.5MM-4]  36.45,50.55 270 top
J23  POWER_JACK  [POWER_JACK_PTH_SLOT_NO_OVRHNG_SILK]  46.48,56.64 90 top
J24  [1X05_NO_SILK]  56.9,50.55 270 top
J25  [SCREWTERMINAL-3.5MM-4]  62.36,50.55 270 top
J26  POWER_JACK  [POWER_JACK_PTH_SLOT_NO_OVRHNG_SILK]  72.39,56.64 90 top
J27  [1X05_NO_SILK]  82.8,50.55 270 top
J28  [SCREWTERMINAL-3.5MM-4]  88.27,50.55 270 top
J29  POWER_JACK  [POWER_JACK_PTH_SLOT_NO_OVRHNG_SILK]  98.3,56.64 90 top
J30  [1X05_NO_SILK]  108.71,50.55 270 top
J31  [SCREWTERMINAL-3.5MM-4]  114.17,50.55 270 top
J32  POWER_JACK  [POWER_JACK_PTH_SLOT_NO_OVRHNG_SILK]  124.21,56.64 90 top
J33  [1X05_NO_SILK]  134.62,50.55 270 top
J34  [SCREWTERMINAL-3.5MM-4]  140.08,50.55 270 top
J35  POWER_JACK  [POWER_JACK_PTH_SLOT_NO_OVRHNG_SILK]  150.11,56.64 90 top
J36  [1X05_NO_SILK]  160.53,50.55 270 top
J37  [SCREWTERMINAL-3.5MM-4]  10.54,76.45 270 top
J38  POWER_JACK  [POWER_JACK_PTH_SLOT_NO_OVRHNG_SILK]  20.57,82.55 90 top
J39  [1X05_NO_SILK]  30.99,76.45 270 top
J40  [SCREWTERMINAL-3.5MM-4]  36.45,76.45 270 top
J41  POWER_JACK  [POWER_JACK_PTH_SLOT_NO_OVRHNG_SILK]  46.48,82.55 90 top
J42  [1X05_NO_SILK]  56.9,76.45 270 top
J43  [SCREWTERMINAL-3.5MM-4]  62.36,76.45 270 top
J44  POWER_JACK  [POWER_JACK_PTH_SLOT_NO_OVRHNG_SILK]  72.39,82.55 90 top
J45  [1X05_NO_SILK]  82.8,76.45 270 top
J46  [SCREWTERMINAL-3.5MM-4]  88.27,76.45 270 top
J47  POWER_JACK  [POWER_JACK_PTH_SLOT_NO_OVRHNG_SILK]  98.3,82.55 90 top
J48  [1X05_NO_SILK]  108.71,76.45 270 top
J49  [SCREWTERMINAL-3.5MM-4]  114.17,76.45 270 top
J50  POWER_JACK  [POWER_JACK_PTH_SLOT_NO_OVRHNG_SILK]  124.21,82.55 90 top
J51  [1X05_NO_SILK]  134.62,76.45 270 top
J52  [SCREWTERMINAL-3.5MM-4]  140.08,76.45 270 top
J53  POWER_JACK  [POWER_JACK_PTH_SLOT_NO_OVRHNG_SILK]  150.11,82.55 90 top
J54  [1X05_NO_SILK]  160.53,76.45 270 top
J55  [SCREWTERMINAL-3.5MM-4]  10.54,102.36 270 top
J56  POWER_JACK  [POWER_JACK_PTH_SLOT_NO_OVRHNG_SILK]  20.57,108.46 90 top
J57  [1X05_NO_SILK]  30.99,102.36 270 top
J58  [SCREWTERMINAL-3.5MM-4]  36.45,102.36 270 top
J59  POWER_JACK  [POWER_JACK_PTH_SLOT_NO_OVRHNG_SILK]  46.48,108.46 90 top
J60  [1X05_NO_SILK]  56.9,102.36 270 top
J61  [SCREWTERMINAL-3.5MM-4]  62.36,102.36 270 top
J62  POWER_JACK  [POWER_JACK_PTH_SLOT_NO_OVRHNG_SILK]  72.39,108.46 90 top
J63  [1X05_NO_SILK]  82.8,102.36 270 top
J64  [SCREWTERMINAL-3.5MM-4]  88.27,102.36 270 top
J65  POWER_JACK  [POWER_JACK_PTH_SLOT_NO_OVRHNG_SILK]  98.3,108.46 90 top
J66  [1X05_NO_SILK]  108.71,102.36 270 top
J67  [SCREWTERMINAL-3.5MM-4]  114.17,102.36 270 top
J68  POWER_JACK  [POWER_JACK_PTH_SLOT_NO_OVRHNG_SILK]  124.21,108.46 90 top
J69  [1X05_NO_SILK]  134.62,102.36 270 top
J70  [SCREWTERMINAL-3.5MM-4]  140.08,102.36 270 top
J71  POWER_JACK  [POWER_JACK_PTH_SLOT_NO_OVRHNG_SILK]  150.11,108.46 90 top
J72  [1X05_NO_SILK]  160.53,102.36 270 top
L1  6.8UH  [07A7_6U8H]  18.8,13.34 270 top
L2  6.8UH  [07A7_6U8H]  44.7,13.34 270 top
L3  6.8UH  [07A7_6U8H]  70.61,13.34 270 top
L4  6.8UH  [07A7_6U8H]  96.52,13.34 270 top
L5  6.8UH  [07A7_6U8H]  122.43,13.34 270 top
L6  6.8UH  [07A7_6U8H]  148.34,13.34 270 top
L7  6.8UH  [07A7_6U8H]  18.8,39.24 270 top
L8  6.8UH  [07A7_6U8H]  44.7,39.24 270 top
L9  6.8UH  [07A7_6U8H]  70.61,39.24 270 top
L10  6.8UH  [07A7_6U8H]  96.52,39.24 270 top
L11  6.8UH  [07A7_6U8H]  122.43,39.24 270 top
L12  6.8UH  [07A7_6U8H]  148.34,39.24 270 top
L13  6.8UH  [07A7_6U8H]  18.8,65.15 270 top
L14  6.8UH  [07A7_6U8H]  44.7,65.15 270 top
L15  6.8UH  [07A7_6U8H]  70.61,65.15 270 top
L16  6.8UH  [07A7_6U8H]  96.52,65.15 270 top
L17  6.8UH  [07A7_6U8H]  122.43,65.15 270 top
L18  6.8UH  [07A7_6U8H]  148.34,65.15 270 top
L19  6.8UH  [07A7_6U8H]  18.8,91.06 270 top
L20  6.8UH  [07A7_6U8H]  44.7,91.06 270 top
L21  6.8UH  [07A7_6U8H]  70.61,91.06 270 top
L22  6.8UH  [07A7_6U8H]  96.52,91.06 270 top
L23  6.8UH  [07A7_6U8H]  122.43,91.06 270 top
L24  6.8UH  [07A7_6U8H]  148.34,91.06 270 top
LOGO1  OSHW-LOGOMINI  [OSHW-LOGO-MINI]  24.77,23.11 0 top
LOGO2  SFE_LOGO_NAME_FLAME.1_INCH  [SFE_LOGO_NAME_FLAME_.1]  22.99,27.3 180 bottom
LOGO3  OSHW-LOGOMINI  [OSHW-LOGO-MINI]  50.67,23.11 0 top
LOGO4  SFE_LOGO_NAME_FLAME.1_INCH  [SFE_LOGO_NAME_FLAME_.1]  48.89,27.3 180 bottom
LOGO5  OSHW-LOGOMINI  [OSHW-LOGO-MINI]  76.58,23.11 0 top
LOGO6  SFE_LOGO_NAME_FLAME.1_INCH  [SFE_LOGO_NAME_FLAME_.1]  74.8,27.3 180 bottom
LOGO7  OSHW-LOGOMINI  [OSHW-LOGO-MINI]  102.49,23.11 0 top
LOGO8  SFE_LOGO_NAME_FLAME.1_INCH  [SFE_LOGO_NAME_FLAME_.1]  100.71,27.3 180 bottom
LOGO9  OSHW-LOGOMINI  [OSHW-LOGO-MINI]  128.4,23.11 0 top
LOGO10  SFE_LOGO_NAME_FLAME.1_INCH  [SFE_LOGO_NAME_FLAME_.1]  126.62,27.3 180 bottom
LOGO11  OSHW-LOGOMINI  [OSHW-LOGO-MINI]  154.31,23.11 0 top
LOGO12  SFE_LOGO_NAME_FLAME.1_INCH  [SFE_LOGO_NAME_FLAME_.1]  152.53,27.3 180 bottom
LOGO13  OSHW-LOGOMINI  [OSHW-LOGO-MINI]  24.77,49.02 0 top
LOGO14  SFE_LOGO_NAME_FLAME.1_INCH  [SFE_LOGO_NAME_FLAME_.1]  22.99,53.21 180 bottom
LOGO15  OSHW-LOGOMINI  [OSHW-LOGO-MINI]  50.67,49.02 0 top
LOGO16  SFE_LOGO_NAME_FLAME.1_INCH  [SFE_LOGO_NAME_FLAME_.1]  48.89,53.21 180 bottom
LOGO17  OSHW-LOGOMINI  [OSHW-LOGO-MINI]  76.58,49.02 0 top
LOGO18  SFE_LOGO_NAME_FLAME.1_INCH  [SFE_LOGO_NAME_FLAME_.1]  74.8,53.21 180 bottom
LOGO19  OSHW-LOGOMINI  [OSHW-LOGO-MINI]  102.49,49.02 0 top
LOGO20  SFE_LOGO_NAME_FLAME.1_INCH  [SFE_LOGO_NAME_FLAME_.1]  100.71,53.21 180 bottom
LOGO21  OSHW-LOGOMINI  [OSHW-LOGO-MINI]  128.4,49.02 0 top
LOGO22  SFE_LOGO_NAME_FLAME.1_INCH  [SFE_LOGO_NAME_FLAME_.1]  126.62,53.21 180 bottom
LOGO23  OSHW-LOGOMINI  [OSHW-LOGO-MINI]  154.31,49.02 0 top
LOGO24  SFE_LOGO_NAME_FLAME.1_INCH  [SFE_LOGO_NAME_FLAME_.1]  152.53,53.21 180 bottom
LOGO25  OSHW-LOGOMINI  [OSHW-LOGO-MINI]  24.77,74.93 0 top
LOGO26  SFE_LOGO_NAME_FLAME.1_INCH  [SFE_LOGO_NAME_FLAME_.1]  22.99,79.12 180 bottom
LOGO27  OSHW-LOGOMINI  [OSHW-LOGO-MINI]  50.67,74.93 0 top
LOGO28  SFE_LOGO_NAME_FLAME.1_INCH  [SFE_LOGO_NAME_FLAME_.1]  48.89,79.12 180 bottom
LOGO29  OSHW-LOGOMINI  [OSHW-LOGO-MINI]  76.58,74.93 0 top
LOGO30  SFE_LOGO_NAME_FLAME.1_INCH  [SFE_LOGO_NAME_FLAME_.1]  74.8,79.12 180 bottom
LOGO31  OSHW-LOGOMINI  [OSHW-LOGO-MINI]  102.49,74.93 0 top
LOGO32  SFE_LOGO_NAME_FLAME.1_INCH  [SFE_LOGO_NAME_FLAME_.1]  100.71,79.12 180 bottom
LOGO33  OSHW-LOGOMINI  [OSHW-LOGO-MINI]  128.4,74.93 0 top
LOGO34  SFE_LOGO_NAME_FLAME.1_INCH  [SFE_LOGO_NAME_FLAME_.1]  126.62,79.12 180 bottom
LOGO35  OSHW-LOGOMINI  [OSHW-LOGO-MINI]  154.31,74.93 0 top
LOGO36  SFE_LOGO_NAME_FLAME.1_INCH  [SFE_LOGO_NAME_FLAME_.1]  152.53,79.12 180 bottom
LOGO37  OSHW-LOGOMINI  [OSHW-LOGO-MINI]  24.77,100.84 0 top
LOGO38  SFE_LOGO_NAME_FLAME.1_INCH  [SFE_LOGO_NAME_FLAME_.1]  22.99,105.03 180 bottom
LOGO39  OSHW-LOGOMINI  [OSHW-LOGO-MINI]  50.67,100.84 0 top
LOGO40  SFE_LOGO_NAME_FLAME.1_INCH  [SFE_LOGO_NAME_FLAME_.1]  48.89,105.03 180 bottom
LOGO41  OSHW-LOGOMINI  [OSHW-LOGO-MINI]  76.58,100.84 0 top
LOGO42  SFE_LOGO_NAME_FLAME.1_INCH  [SFE_LOGO_NAME_FLAME_.1]  74.8,105.03 180 bottom
LOGO43  OSHW-LOGOMINI  [OSHW-LOGO-MINI]  102.49,100.84 0 top
LOGO44  SFE_LOGO_NAME_FLAME.1_INCH  [SFE_LOGO_NAME_FLAME_.1]  100.71,105.03 180 bottom
LOGO45  OSHW-LOGOMINI  [OSHW-LOGO-MINI]  128.4,100.84 0 top
LOGO46  SFE_LOGO_NAME_FLAME.1_INCH  [SFE_LOGO_NAME_FLAME_.1]  126.62,105.03 180 bottom
LOGO47  OSHW-LOGOMINI  [OSHW-LOGO-MINI]  154.31,100.84 0 top
LOGO48  SFE_LOGO_NAME_FLAME.1_INCH  [SFE_LOGO_NAME_FLAME_.1]  152.53,105.03 180 bottom
PWR  JUMPER-SMT_2_NC_TRACE_SILK  [SMT-JUMPER_2_NC_TRACE_SILK]  12.95,8.51 0 bottom
PWR1  JUMPER-SMT_2_NC_TRACE_SILK  [SMT-JUMPER_2_NC_TRACE_SILK]  38.86,8.51 0 bottom
PWR2  JUMPER-SMT_2_NC_TRACE_SILK  [SMT-JUMPER_2_NC_TRACE_SILK]  64.77,8.51 0 bottom
PWR3  JUMPER-SMT_2_NC_TRACE_SILK  [SMT-JUMPER_2_NC_TRACE_SILK]  90.68,8.51 0 bottom
PWR4  JUMPER-SMT_2_NC_TRACE_SILK  [SMT-JUMPER_2_NC_TRACE_SILK]  116.59,8.51 0 bottom
PWR5  JUMPER-SMT_2_NC_TRACE_SILK  [SMT-JUMPER_2_NC_TRACE_SILK]  142.49,8.51 0 bottom
PWR6  JUMPER-SMT_2_NC_TRACE_SILK  [SMT-JUMPER_2_NC_TRACE_SILK]  12.95,34.42 0 bottom
PWR7  JUMPER-SMT_2_NC_TRACE_SILK  [SMT-JUMPER_2_NC_TRACE_SILK]  38.86,34.42 0 bottom
PWR8  JUMPER-SMT_2_NC_TRACE_SILK  [SMT-JUMPER_2_NC_TRACE_SILK]  64.77,34.42 0 bottom
PWR9  JUMPER-SMT_2_NC_TRACE_SILK  [SMT-JUMPER_2_NC_TRACE_SILK]  90.68,34.42 0 bottom
PWR10  JUMPER-SMT_2_NC_TRACE_SILK  [SMT-JUMPER_2_NC_TRACE_SILK]  116.59,34.42 0 bottom
PWR11  JUMPER-SMT_2_NC_TRACE_SILK  [SMT-JUMPER_2_NC_TRACE_SILK]  142.49,34.42 0 bottom
PWR12  JUMPER-SMT_2_NC_TRACE_SILK  [SMT-JUMPER_2_NC_TRACE_SILK]  12.95,60.32 0 bottom
PWR13  JUMPER-SMT_2_NC_TRACE_SILK  [SMT-JUMPER_2_NC_TRACE_SILK]  38.86,60.32 0 bottom
PWR14  JUMPER-SMT_2_NC_TRACE_SILK  [SMT-JUMPER_2_NC_TRACE_SILK]  64.77,60.32 0 bottom
PWR15  JUMPER-SMT_2_NC_TRACE_SILK  [SMT-JUMPER_2_NC_TRACE_SILK]  90.68,60.32 0 bottom
PWR16  JUMPER-SMT_2_NC_TRACE_SILK  [SMT-JUMPER_2_NC_TRACE_SILK]  116.59,60.32 0 bottom
PWR17  JUMPER-SMT_2_NC_TRACE_SILK  [SMT-JUMPER_2_NC_TRACE_SILK]  142.49,60.32 0 bottom
PWR18  JUMPER-SMT_2_NC_TRACE_SILK  [SMT-JUMPER_2_NC_TRACE_SILK]  12.95,86.23 0 bottom
PWR19  JUMPER-SMT_2_NC_TRACE_SILK  [SMT-JUMPER_2_NC_TRACE_SILK]  38.86,86.23 0 bottom
PWR20  JUMPER-SMT_2_NC_TRACE_SILK  [SMT-JUMPER_2_NC_TRACE_SILK]  64.77,86.23 0 bottom
PWR21  JUMPER-SMT_2_NC_TRACE_SILK  [SMT-JUMPER_2_NC_TRACE_SILK]  90.68,86.23 0 bottom
PWR22  JUMPER-SMT_2_NC_TRACE_SILK  [SMT-JUMPER_2_NC_TRACE_SILK]  116.59,86.23 0 bottom
PWR23  JUMPER-SMT_2_NC_TRACE_SILK  [SMT-JUMPER_2_NC_TRACE_SILK]  142.49,86.23 0 bottom
R1  220K  [0402-TIGHT]  16.69,19.38 270 top
R2  41.2K  [0402-TIGHT]  15.99,20.95 180 top
R3  93.1k  [0402-TIGHT]  18.92,22.35 0 top
R4  22k  [0402-TIGHT]  16.76,22.35 0 top
R5  2.2k  [0402-TIGHT]  22.99,8.38 270 top
R6  41.2K  [0402-TIGHT]  41.9,20.95 180 top
R7  93.1k  [0402-TIGHT]  44.83,22.35 0 top
R8  22k  [0402-TIGHT]  42.67,22.35 0 top
R9  2.2k  [0402-TIGHT]  48.89,8.38 270 top
R10  220K  [0402-TIGHT]  42.6,19.38 270 top
R11  41.2K  [0402-TIGHT]  67.81,20.95 180 top
R12  93.1k  [0402-TIGHT]  70.74,22.35 0 top
R13  22k  [0402-TIGHT]  68.58,22.35 0 top
R14  2.2k  [0402-TIGHT]  74.8,8.38 270 top
R15  220K  [0402-TIGHT]  68.5,19.38 270 top
R16  41.2K  [0402-TIGHT]  93.71,20.95 180 top
R17  93.1k  [0402-TIGHT]  96.65,22.35 0 top
R18  22k  [0402-TIGHT]  94.49,22.35 0 top
R19  2.2k  [0402-TIGHT]  100.71,8.38 270 top
R20  220K  [0402-TIGHT]  94.41,19.38 270 top
R21  41.2K  [0402-TIGHT]  119.62,20.95 180 top
R22  93.1k  [0402-TIGHT]  122.56,22.35 0 top
R23  22k  [0402-TIGHT]  120.4,22.35 0 top
R24  2.2k  [0402-TIGHT]  126.62,8.38 270 top
R25  220K  [0402-TIGHT]  120.32,19.38 270 top
R26  41.2K  [0402-TIGHT]  145.53,20.95 180 top
R27  93.1k  [0402-TIGHT]  148.46,22.35 0 top
R28  22k  [0402-TIGHT]  146.3,22.35 0 top
R29  2.2k  [0402-TIGHT]  152.53,8.38 270 top
R30  220K  [0402-TIGHT]  146.23,19.38 270 top
R31  41.2K  [0402-TIGHT]  15.99,46.86 180 top
R32  93.1k  [0402-TIGHT]  18.92,48.26 0 top
R33  22k  [0402-TIGHT]  16.76,48.26 0 top
R34  2.2k  [0402-TIGHT]  22.99,34.29 270 top
R35  220K  [0402-TIGHT]  16.69,45.29 270 top
R36  41.2K  [0402-TIGHT]  41.9,46.86 180 top
R37  93.1k  [0402-TIGHT]  44.83,48.26 0 top
R38  22k  [0402-TIGHT]  42.67,48.26 0 top
R39  2.2k  [0402-TIGHT]  48.89,34.29 270 top
R40  220K  [0402-TIGHT]  42.6,45.29 270 top
R41  41.2K  [0402-TIGHT]  67.81,46.86 180 top
R42  93.1k  [0402-TIGHT]  70.74,48.26 0 top
R43  22k  [0402-TIGHT]  68.58,48.26 0 top
R44  2.2k  [0402-TIGHT]  74.8,34.29 270 top
R45  220K  [0402-TIGHT]  68.5,45.29 270 top
R46  41.2K  [0402-TIGHT]  93.71,46.86 180 top
R47  93.1k  [0402-TIGHT]  96.65,48.26 0 top
R48  22k  [0402-TIGHT]  94.49,48.26 0 top
R49  2.2k  [0402-TIGHT]  100.71,34.29 270 top
R50  220K  [0402-TIGHT]  94.41,45.29 270 top
R51  41.2K  [0402-TIGHT]  119.62,46.86 180 top
R52  93.1k  [0402-TIGHT]  122.56,48.26 0 top
R53  22k  [0402-TIGHT]  120.4,48.26 0 top
R54  2.2k  [0402-TIGHT]  126.62,34.29 270 top
R55  220K  [0402-TIGHT]  120.32,45.29 270 top
R56  41.2K  [0402-TIGHT]  145.53,46.86 180 top
R57  93.1k  [0402-TIGHT]  148.46,48.26 0 top
R58  22k  [0402-TIGHT]  146.3,48.26 0 top
R59  2.2k  [0402-TIGHT]  152.53,34.29 270 top
R60  220K  [0402-TIGHT]  146.23,45.29 270 top
R61  41.2K  [0402-TIGHT]  15.99,72.77 180 top
R62  93.1k  [0402-TIGHT]  18.92,74.17 0 top
R63  22k  [0402-TIGHT]  16.76,74.17 0 top
R64  2.2k  [0402-TIGHT]  22.99,60.2 270 top
R65  220K  [0402-TIGHT]  16.69,71.2 270 top
R66  41.2K  [0402-TIGHT]  41.9,72.77 180 top
R67  93.1k  [0402-TIGHT]  44.83,74.17 0 top
R68  22k  [0402-TIGHT]  42.67,74.17 0 top
R69  2.2k  [0402-TIGHT]  48.89,60.2 270 top
R70  220K  [0402-TIGHT]  42.6,71.2 270 top
R71  41.2K  [0402-TIGHT]  67.81,72.77 180 top
R72  93.1k  [0402-TIGHT]  70.74,74.17 0 top
R73  22k  [0402-TIGHT]  68.58,74.17 0 top
R74  2.2k  [0402-TIGHT]  74.8,60.2 270 top
R75  220K  [0402-TIGHT]  68.5,71.2 270 top
R76  41.2K  [0402-TIGHT]  93.71,72.77 180 top
R77  93.1k  [0402-TIGHT]  96.65,74.17 0 top
R78  22k  [0402-TIGHT]  94.49,74.17 0 top
R79  2.2k  [0402-TIGHT]  100.71,60.2 270 top
R80  220K  [0402-TIGHT]  94.41,71.2 270 top
R81  41.2K  [0402-TIGHT]  119.62,72.77 180 top
R82  93.1k  [0402-TIGHT]  122.56,74.17 0 top
R83  22k  [0402-TIGHT]  120.4,74.17 0 top
R84  2.2k  [0402-TIGHT]  126.62,60.2 270 top
R85  220K  [0402-TIGHT]  120.32,71.2 270 top
R86  41.2K  [0402-TIGHT]  145.53,72.77 180 top
R87  93.1k  [0402-TIGHT]  148.46,74.17 0 top
R88  22k  [0402-TIGHT]  146.3,74.17 0 top
R89  2.2k  [0402-TIGHT]  152.53,60.2 270 top
R90  220K  [0402-TIGHT]  146.23,71.2 270 top
R91  41.2K  [0402-TIGHT]  15.99,98.68 180 top
R92  93.1k  [0402-TIGHT]  18.92,100.08 0 top
R93  22k  [0402-TIGHT]  16.76,100.08 0 top
R94  2.2k  [0402-TIGHT]  22.99,86.11 270 top
R95  220K  [0402-TIGHT]  16.69,97.1 270 top
R96  41.2K  [0402-TIGHT]  41.9,98.68 180 top
R97  93.1k  [0402-TIGHT]  44.83,100.08 0 top
R98  22k  [0402-TIGHT]  42.67,100.08 0 top
R99  2.2k  [0402-TIGHT]  48.89,86.11 270 top
R100  220K  [0402-TIGHT]  42.6,97.1 270 top
R101  41.2K  [0402-TIGHT]  67.81,98.68 180 top
R102  93.1k  [0402-TIGHT]  70.74,100.08 0 top
R103  22k  [0402-TIGHT]  68.58,100.08 0 top
R104  2.2k  [0402-TIGHT]  74.8,86.11 270 top
R105  220K  [0402-TIGHT]  68.5,97.1 270 top
R106  41.2K  [0402-TIGHT]  93.71,98.68 180 top
R107  93.1k  [0402-TIGHT]  96.65,100.08 0 top
R108  22k  [0402-TIGHT]  94.49,100.08 0 top
R109  2.2k  [0402-TIGHT]  100.71,86.11 270 top
R110  220K  [0402-TIGHT]  94.41,97.1 270 top
R111  41.2K  [0402-TIGHT]  119.62,98.68 180 top
R112  93.1k  [0402-TIGHT]  122.56,100.08 0 top
R113  22k  [0402-TIGHT]  120.4,100.08 0 top
R114  2.2k  [0402-TIGHT]  126.62,86.11 270 top
R115  220K  [0402-TIGHT]  120.32,97.1 270 top
R116  41.2K  [0402-TIGHT]  145.53,98.68 180 top
R117  93.1k  [0402-TIGHT]  148.46,100.08 0 top
R118  22k  [0402-TIGHT]  146.3,100.08 0 top
R119  2.2k  [0402-TIGHT]  152.53,86.11 270 top
R120  220K  [0402-TIGHT]  146.23,97.1 270 top
U1  AP63357  [V-DFN3020-13]  19.18,20.07 180 top
U2  AP63357  [V-DFN3020-13]  45.08,20.07 180 top
U3  AP63357  [V-DFN3020-13]  70.99,20.07 180 top
U4  AP63357  [V-DFN3020-13]  96.9,20.07 180 top
U5  AP63357  [V-DFN3020-13]  122.81,20.07 180 top
U6  AP63357  [V-DFN3020-13]  148.72,20.07 180 top
U7  AP63357  [V-DFN3020-13]  19.18,45.97 180 top
U8  AP63357  [V-DFN3020-13]  45.08,45.97 180 top
U9  AP63357  [V-DFN3020-13]  70.99,45.97 180 top
U10  AP63357  [V-DFN3020-13]  96.9,45.97 180 top
U11  AP63357  [V-DFN3020-13]  122.81,45.97 180 top
U12  AP63357  [V-DFN3020-13]  148.72,45.97 180 top
U13  AP63357  [V-DFN3020-13]  19.18,71.88 180 top
U14  AP63357  [V-DFN3020-13]  45.08,71.88 180 top
U15  AP63357  [V-DFN3020-13]  70.99,71.88 180 top
U16  AP63357  [V-DFN3020-13]  96.9,71.88 180 top
U17  AP63357  [V-DFN3020-13]  122.81,71.88 180 top
U18  AP63357  [V-DFN3020-13]  148.72,71.88 180 top
U19  AP63357  [V-DFN3020-13]  19.18,97.79 180 top
U20  AP63357  [V-DFN3020-13]  45.08,97.79 180 top
U21  AP63357  [V-DFN3020-13]  70.99,97.79 180 top
U22  AP63357  [V-DFN3020-13]  96.9,97.79 180 top
U23  AP63357  [V-DFN3020-13]  122.81,97.79 180 top
U24  AP63357  [V-DFN3020-13]  148.72,97.79 180 top
U$1  [AP63357DV#70]  16.89,8.76 0 top
U$2  [5V_BUCK_REGULATOR0]  16.89,7.62 0 top
U$3  [#5V#4]  14.61,14.1 90 top
U$4  [#VIN#8]  8.38,24.64 270 bottom
U$5  [#VIN#0]  29.34,22.1 90 top
U$6  [#GND#0]  29.34,18.29 90 top
U$7  [#GND#0]  29.34,18.29 270 bottom
U$8  [#EN_#0]  29.08,24.64 0 top
U$9  [#GND#9]  8.38,19.43 270 bottom
U$10  [#5V#10]  8.38,14.1 270 bottom
U$11  [6V#32V10]  14.86,24.64 180 bottom
U$12  [HOT##0]  27.81,14.86 90 top
U$13  [#VIN#0]  29.34,22.1 270 bottom
U$14  [#5V#0]  29.34,14.48 270 bottom
U$15  [#LED_#0]  12.95,11.43 270 bottom
U$16  [CAUTION#0]  26.8,14.99 90 top
U$17  [SFE_LOGO_FLAME_COPPER_EXPOSED_.1]  26.29,30.35 0 top
U$18  [VIN#_6V#32V0]  11.05,27.05 0 top
U$19  [#EN_#0]  29.08,24.64 180 bottom
U$20  [PWR0]  25.27,7.75 0 top
U$21  [#GND#1]  15.97,17.99 0 top
U$22  [HIGH_TEMP_WARNING]  25.02,11.3 0 top
U$23  [5V_BUCK_REGULATOR0]  42.8,7.62 0 top
U$24  [#5V#0]  29.34,14.48 90 top
U$25  [AP63357DV#70]  42.8,8.76 0 top
U$26  [#VIN#3]  14.61,24 90 top
U$27  [#EN_#0]  54.99,24.64 0 top
U$28  [#VIN#0]  55.24,22.1 270 bottom
U$29  [SFE_LOGO_FLAME_COPPER_EXPOSED_.1]  52.2,30.35 0 top
U$30  [VIN#_6V#32V0]  36.96,27.05 0 top
U$31  [#EN_#0]  54.99,24.64 180 bottom
U$32  [#LED_#0]  38.86,11.43 270 bottom
U$33  [PWR0]  51.18,7.75 0 top
U$34  [#GND#1]  41.88,17.99 0 top
U$35  [HIGH_TEMP_WARNING]  50.93,11.3 0 top
U$36  [#5V#0]  55.24,14.48 90 top
U$37  [#VIN#0]  55.24,22.1 90 top
U$38  [#GND#0]  55.24,18.29 90 top
U$39  [#GND#0]  55.24,18.29 270 bottom
U$40  [#5V#0]  55.24,14.48 270 bottom
U$41  [CAUTION#0]  52.7,14.99 90 top
U$42  [#VIN#3]  40.51,24 90 top
U$43  [#5V#4]  40.51,14.1 90 top
U$44  [#VIN#8]  34.29,24.64 270 bottom
U$45  [#GND#9]  34.29,19.43 270 bottom
U$46  [#5V#10]  34.29,14.1 270 bottom
U$47  [6V#32V10]  40.77,24.64 180 bottom
U$48  [HOT##0]  53.72,14.86 90 top
U$49  [5V_BUCK_REGULATOR0]  68.71,7.62 0 top
U$50  [AP63357DV#70]  68.71,8.76 0 top
U$51  [#EN_#0]  80.9,24.64 0 top
U$52  [#VIN#0]  81.15,22.1 270 bottom
U$53  [SFE_LOGO_FLAME_COPPER_EXPOSED_.1]  78.11,30.35 0 top
U$54  [VIN#_6V#32V0]  62.86,27.05 0 top
U$55  [#EN_#0]  80.9,24.64 180 bottom
U$56  [#LED_#0]  64.77,11.43 270 bottom
U$57  [PWR0]  77.09,7.75 0 top
U$58  [#GND#1]  67.79,17.99 0 top
U$59  [HIGH_TEMP_WARNING]  76.84,11.3 0 top
U$60  [#5V#0]  81.15,14.48 90 top
U$61  [#VIN#0]  81.15,22.1 90 top
U$62  [#GND#0]  81.15,18.29 90 top
U$63  [#GND#0]  81.15,18.29 270 bottom
U$64  [#5V#0]  81.15,14.48 270 bottom
U$65  [CAUTION#0]  78.61,14.99 90 top
U$66  [#VIN#3]  66.42,24 90 top
U$67  [#5V#4]  66.42,14.1 90 top
U$68  [#VIN#8]  60.2,24.64 270 bottom
U$69  [#GND#9]  60.2,19.43 270 bottom
U$70  [#5V#10]  60.2,14.1 270 bottom
U$71  [6V#32V10]  66.67,24.64 180 bottom
U$72  [HOT##0]  79.63,14.86 90 top
U$73  [5V_BUCK_REGULATOR0]  94.62,7.62 0 top
U$74  [AP63357DV#70]  94.62,8.76 0 top
U$75  [#EN_#0]  106.81,24.64 0 top
U$76  [#VIN#0]  107.06,22.1 270 bottom
U$77  [SFE_LOGO_FLAME_COPPER_EXPOSED_.1]  104.01,30.35 0 top
U$78  [VIN#_6V#32V0]  88.77,27.05 0 top
U$79  [#EN_#0]  106.81,24.64 180 bottom
U$80  [#LED_#0]  90.68,11.43 270 bottom
U$81  [PWR0]  103,7.75 0 top
U$82  [#GND#1]  93.7,17.99 0 top
U$83  [HIGH_TEMP_WARNING]  102.74,11.3 0 top
U$84  [#5V#0]  107.06,14.48 90 top
U$85  [#VIN#0]  107.06,22.1 90 top
U$86  [#GND#0]  107.06,18.29 90 top
U$87  [#GND#0]  107.06,18.29 270 bottom
U$88  [#5V#0]  107.06,14.48 270 bottom
U$89  [CAUTION#0]  104.52,14.99 90 top
U$90  [#VIN#3]  92.33,24 90 top
U$91  [#5V#4]  92.33,14.1 90 top
U$92  [#VIN#8]  86.11,24.64 270 bottom
U$93  [#GND#9]  86.11,19.43 270 bottom
U$94  [#5V#10]  86.11,14.1 270 bottom
U$95  [6V#32V10]  92.58,24.64 180 bottom
U$96  [HOT##0]  105.54,14.86 90 top
U$97  [5V_BUCK_REGULATOR0]  120.52,7.62 0 top
U$98  [AP63357DV#70]  120.52,8.76 0 top
U$99  [#EN_#0]  132.72,24.64 0 top
U$100  [#VIN#0]  132.97,22.1 270 bottom
U$101  [SFE_LOGO_FLAME_COPPER_EXPOSED_.1]  129.92,30.35 0 top
U$102  [VIN#_6V#32V0]  114.68,27.05 0 top
U$103  [#EN_#0]  132.72,24.64 180 bottom
U$104  [#LED_#0]  116.59,11.43 270 bottom
U$105  [PWR0]  128.91,7.75 0 top
U$106  [#GND#1]  119.6,17.99 0 top
U$107  [HIGH_TEMP_WARNING]  128.65,11.3 0 top
U$108  [#5V#0]  132.97,14.48 90 top
U$109  [#VIN#0]  132.97,22.1 90 top
U$110  [#GND#0]  132.97,18.29 90 top
U$111  [#GND#0]  132.97,18.29 270 bottom
U$112  [#5V#0]  132.97,14.48 270 bottom
U$113  [CAUTION#0]  130.43,14.99 90 top
U$114  [#VIN#3]  118.24,24 90 top
U$115  [#5V#4]  118.24,14.1 90 top
U$116  [#VIN#8]  112.01,24.64 270 bottom
U$117  [#GND#9]  112.01,19.43 270 bottom
U$118  [#5V#10]  112.01,14.1 270 bottom
U$119  [6V#32V10]  118.49,24.64 180 bottom
U$120  [HOT##0]  131.44,14.86 90 top
U$121  [5V_BUCK_REGULATOR0]  146.43,7.62 0 top
U$122  [AP63357DV#70]  146.43,8.76 0 top
U$123  [#EN_#0]  158.62,24.64 0 top
U$124  [#VIN#0]  158.88,22.1 270 bottom
U$125  [SFE_LOGO_FLAME_COPPER_EXPOSED_.1]  155.83,30.35 0 top
U$126  [VIN#_6V#32V0]  140.59,27.05 0 top
U$127  [#EN_#0]  158.62,24.64 180 bottom
U$128  [#LED_#0]  142.49,11.43 270 bottom
U$129  [PWR0]  154.81,7.75 0 top
U$130  [#GND#1]  145.51,17.99 0 top
U$131  [HIGH_TEMP_WARNING]  154.56,11.3 0 top
U$132  [#5V#0]  158.88,14.48 90 top
U$133  [#VIN#0]  158.88,22.1 90 top
U$134  [#GND#0]  158.88,18.29 90 top
U$135  [#GND#0]  158.88,18.29 270 bottom
U$136  [#5V#0]  158.88,14.48 270 bottom
U$137  [CAUTION#0]  156.34,14.99 90 top
U$138  [#VIN#3]  144.15,24 90 top
U$139  [#5V#4]  144.15,14.1 90 top
U$140  [#VIN#8]  137.92,24.64 270 bottom
U$141  [#GND#9]  137.92,19.43 270 bottom
U$142  [#5V#10]  137.92,14.1 270 bottom
U$143  [6V#32V10]  144.4,24.64 180 bottom
U$144  [HOT##0]  157.35,14.86 90 top
U$145  [5V_BUCK_REGULATOR0]  16.89,33.53 0 top
U$146  [AP63357DV#70]  16.89,34.67 0 top
U$147  [#EN_#0]  29.08,50.55 0 top
U$148  [#VIN#0]  29.34,48.01 270 bottom
U$149  [SFE_LOGO_FLAME_COPPER_EXPOSED_.1]  26.29,56.26 0 top
U$150  [VIN#_6V#32V0]  11.05,52.96 0 top
U$151  [#EN_#0]  29.08,50.55 180 bottom
U$152  [#LED_#0]  12.95,37.34 270 bottom
U$153  [PWR0]  25.27,33.66 0 top
U$154  [#GND#1]  15.97,43.9 0 top
U$155  [HIGH_TEMP_WARNING]  25.02,37.21 0 top
U$156  [#5V#0]  29.34,40.39 90 top
U$157  [#VIN#0]  29.34,48.01 90 top
U$158  [#GND#0]  29.34,44.2 90 top
U$159  [#GND#0]  29.34,44.2 270 bottom
U$160  [#5V#0]  29.34,40.39 270 bottom
U$161  [CAUTION#0]  26.8,40.89 90 top
U$162  [#VIN#3]  14.61,49.91 90 top
U$163  [#5V#4]  14.61,40 90 top
U$164  [#VIN#8]  8.38,50.55 270 bottom
U$165  [#GND#9]  8.38,45.34 270 bottom
U$166  [#5V#10]  8.38,40 270 bottom
U$167  [6V#32V10]  14.86,50.55 180 bottom
U$168  [HOT##0]  27.81,40.77 90 top
U$169  [5V_BUCK_REGULATOR0]  42.8,33.53 0 top
U$170  [AP63357DV#70]  42.8,34.67 0 top
U$171  [#EN_#0]  54.99,50.55 0 top
U$172  [#VIN#0]  55.24,48.01 270 bottom
U$173  [SFE_LOGO_FLAME_COPPER_EXPOSED_.1]  52.2,56.26 0 top
U$174  [VIN#_6V#32V0]  36.96,52.96 0 top
U$175  [#EN_#0]  54.99,50.55 180 bottom
U$176  [#LED_#0]  38.86,37.34 270 bottom
U$177  [PWR0]  51.18,33.66 0 top
U$178  [#GND#1]  41.88,43.9 0 top
U$179  [HIGH_TEMP_WARNING]  50.93,37.21 0 top
U$180  [#5V#0]  55.24,40.39 90 top
U$181  [#VIN#0]  55.24,48.01 90 top
U$182  [#GND#0]  55.24,44.2 90 top
U$183  [#GND#0]  55.24,44.2 270 bottom
U$184  [#5V#0]  55.24,40.39 270 bottom
U$185  [CAUTION#0]  52.7,40.89 90 top
U$186  [#VIN#3]  40.51,49.91 90 top
U$187  [#5V#4]  40.51,40 90 top
U$188  [#VIN#8]  34.29,50.55 270 bottom
U$189  [#GND#9]  34.29,45.34 270 bottom
U$190  [#5V#10]  34.29,40 270 bottom
U$191  [6V#32V10]  40.77,50.55 180 bottom
U$192  [HOT##0]  53.72,40.77 90 top
U$193  [5V_BUCK_REGULATOR0]  68.71,33.53 0 top
U$194  [AP63357DV#70]  68.71,34.67 0 top
U$195  [#EN_#0]  80.9,50.55 0 top
U$196  [#VIN#0]  81.15,48.01 270 bottom
U$197  [SFE_LOGO_FLAME_COPPER_EXPOSED_.1]  78.11,56.26 0 top
U$198  [VIN#_6V#32V0]  62.86,52.96 0 top
U$199  [#EN_#0]  80.9,50.55 180 bottom
U$200  [#LED_#0]  64.77,37.34 270 bottom
U$201  [PWR0]  77.09,33.66 0 top
U$202  [#GND#1]  67.79,43.9 0 top
U$203  [HIGH_TEMP_WARNING]  76.84,37.21 0 top
U$204  [#5V#0]  81.15,40.39 90 top
U$205  [#VIN#0]  81.15,48.01 90 top
U$206  [#GND#0]  81.15,44.2 90 top
U$207  [#GND#0]  81.15,44.2 270 bottom
U$208  [#5V#0]  81.15,40.39 270 bottom
U$209  [CAUTION#0]  78.61,40.89 90 top
U$210  [#VIN#3]  66.42,49.91 90 top
U$211  [#5V#4]  66.42,40 90 top
U$212  [#VIN#8]  60.2,50.55 270 bottom
U$213  [#GND#9]  60.2,45.34 270 bottom
U$214  [#5V#10]  60.2,40 270 bottom
U$215  [6V#32V10]  66.67,50.55 180 bottom
U$216  [HOT##0]  79.63,40.77 90 top
U$217  [5V_BUCK_REGULATOR0]  94.62,33.53 0 top
U$218  [AP63357DV#70]  94.62,34.67 0 top
U$219  [#EN_#0]  106.81,50.55 0 top
U$220  [#VIN#0]  107.06,48.01 270 bottom
U$221  [SFE_LOGO_FLAME_COPPER_EXPOSED_.1]  104.01,56.26 0 top
U$222  [VIN#_6V#32V0]  88.77,52.96 0 top
U$223  [#EN_#0]  106.81,50.55 180 bottom
U$224  [#LED_#0]  90.68,37.34 270 bottom
U$225  [PWR0]  103,33.66 0 top
U$226  [#GND#1]  93.7,43.9 0 top
U$227  [HIGH_TEMP_WARNING]  102.74,37.21 0 top
U$228  [#5V#0]  107.06,40.39 90 top
U$229  [#VIN#0]  107.06,48.01 90 top
U$230  [#GND#0]  107.06,44.2 90 top
U$231  [#GND#0]  107.06,44.2 270 bottom
U$232  [#5V#0]  107.06,40.39 270 bottom
U$233  [CAUTION#0]  104.52,40.89 90 top
U$234  [#VIN#3]  92.33,49.91 90 top
U$235  [#5V#4]  92.33,40 90 top
U$236  [#VIN#8]  86.11,50.55 270 bottom
U$237  [#GND#9]  86.11,45.34 270 bottom
U$238  [#5V#10]  86.11,40 270 bottom
U$239  [6V#32V10]  92.58,50.55 180 bottom
U$240  [HOT##0]  105.54,40.77 90 top
U$241  [5V_BUCK_REGULATOR0]  120.52,33.53 0 top
U$242  [AP63357DV#70]  120.52,34.67 0 top
U$243  [#EN_#0]  132.72,50.55 0 top
U$244  [#VIN#0]  132.97,48.01 270 bottom
U$245  [SFE_LOGO_FLAME_COPPER_EXPOSED_.1]  129.92,56.26 0 top
U$246  [VIN#_6V#32V0]  114.68,52.96 0 top
U$247  [#EN_#0]  132.72,50.55 180 bottom
U$248  [#LED_#0]  116.59,37.34 270 bottom
U$249  [PWR0]  128.91,33.66 0 top
U$250  [#GND#1]  119.6,43.9 0 top
U$251  [HIGH_TEMP_WARNING]  128.65,37.21 0 top
U$252  [#5V#0]  132.97,40.39 90 top
U$253  [#VIN#0]  132.97,48.01 90 top
U$254  [#GND#0]  132.97,44.2 90 top
U$255  [#GND#0]  132.97,44.2 270 bottom
U$256  [#5V#0]  132.97,40.39 270 bottom
U$257  [CAUTION#0]  130.43,40.89 90 top
U$258  [#VIN#3]  118.24,49.91 90 top
U$259  [#5V#4]  118.24,40 90 top
U$260  [#VIN#8]  112.01,50.55 270 bottom
U$261  [#GND#9]  112.01,45.34 270 bottom
U$262  [#5V#10]  112.01,40 270 bottom
U$263  [6V#32V10]  118.49,50.55 180 bottom
U$264  [HOT##0]  131.44,40.77 90 top
U$265  [5V_BUCK_REGULATOR0]  146.43,33.53 0 top
U$266  [AP63357DV#70]  146.43,34.67 0 top
U$267  [#EN_#0]  158.62,50.55 0 top
U$268  [#VIN#0]  158.88,48.01 270 bottom
U$269  [SFE_LOGO_FLAME_COPPER_EXPOSED_.1]  155.83,56.26 0 top
U$270  [VIN#_6V#32V0]  140.59,52.96 0 top
U$271  [#EN_#0]  158.62,50.55 180 bottom
U$272  [#LED_#0]  142.49,37.34 270 bottom
U$273  [PWR0]  154.81,33.66 0 top
U$274  [#GND#1]  145.51,43.9 0 top
U$275  [HIGH_TEMP_WARNING]  154.56,37.21 0 top
U$276  [#5V#0]  158.88,40.39 90 top
U$277  [#VIN#0]  158.88,48.01 90 top
U$278  [#GND#0]  158.88,44.2 90 top
U$279  [#GND#0]  158.88,44.2 270 bottom
U$280  [#5V#0]  158.88,40.39 270 bottom
U$281  [CAUTION#0]  156.34,40.89 90 top
U$282  [#VIN#3]  144.15,49.91 90 top
U$283  [#5V#4]  144.15,40 90 top
U$284  [#VIN#8]  137.92,50.55 270 bottom
U$285  [#GND#9]  137.92,45.34 270 bottom
U$286  [#5V#10]  137.92,40 270 bottom
U$287  [6V#32V10]  144.4,50.55 180 bottom
U$288  [HOT##0]  157.35,40.77 90 top
U$289  [5V_BUCK_REGULATOR0]  16.89,59.44 0 top
U$290  [AP63357DV#70]  16.89,60.58 0 top
U$291  [#EN_#0]  29.08,76.45 0 top
U$292  [#VIN#0]  29.34,73.91 270 bottom
U$293  [SFE_LOGO_FLAME_COPPER_EXPOSED_.1]  26.29,82.17 0 top
U$294  [VIN#_6V#32V0]  11.05,78.87 0 top
U$295  [#EN_#0]  29.08,76.45 180 bottom
U$296  [#LED_#0]  12.95,63.25 270 bottom
U$297  [PWR0]  25.27,59.56 0 top
U$298  [#GND#1]  15.97,69.8 0 top
U$299  [HIGH_TEMP_WARNING]  25.02,63.12 0 top
U$300  [#5V#0]  29.34,66.29 90 top
U$301  [#VIN#0]  29.34,73.91 90 top
U$302  [#GND#0]  29.34,70.1 90 top
U$303  [#GND#0]  29.34,70.1 270 bottom
U$304  [#5V#0]  29.34,66.29 270 bottom
U$305  [CAUTION#0]  26.8,66.8 90 top
U$306  [#VIN#3]  14.61,75.82 90 top
U$307  [#5V#4]  14.61,65.91 90 top
U$308  [#VIN#8]  8.38,76.45 270 bottom
U$309  [#GND#9]  8.38,71.25 270 bottom
U$310  [#5V#10]  8.38,65.91 270 bottom
U$311  [6V#32V10]  14.86,76.45 180 bottom
U$312  [HOT##0]  27.81,66.67 90 top
U$313  [5V_BUCK_REGULATOR0]  42.8,59.44 0 top
U$314  [AP63357DV#70]  42.8,60.58 0 top
U$315  [#EN_#0]  54.99,76.45 0 top
U$316  [#VIN#0]  55.24,73.91 270 bottom
U$317  [SFE_LOGO_FLAME_COPPER_EXPOSED_.1]  52.2,82.17 0 top
U$318  [VIN#_6V#32V0]  36.96,78.87 0 top
U$319  [#EN_#0]  54.99,76.45 180 bottom
U$320  [#LED_#0]  38.86,63.25 270 bottom
U$321  [PWR0]  51.18,59.56 0 top
U$322  [#GND#1]  41.88,69.8 0 top
U$323  [HIGH_TEMP_WARNING]  50.93,63.12 0 top
U$324  [#5V#0]  55.24,66.29 90 top
U$325  [#VIN#0]  55.24,73.91 90 top
U$326  [#GND#0]  55.24,70.1 90 top
U$327  [#GND#0]  55.24,70.1 270 bottom
U$328  [#5V#0]  55.24,66.29 270 bottom
U$329  [CAUTION#0]  52.7,66.8 90 top
U$330  [#VIN#3]  40.51,75.82 90 top
U$331  [#5V#4]  40.51,65.91 90 top
U$332  [#VIN#8]  34.29,76.45 270 bottom
U$333  [#GND#9]  34.29,71.25 270 bottom